# EAGLE board warp-revC (EAGLE 9.4.2)
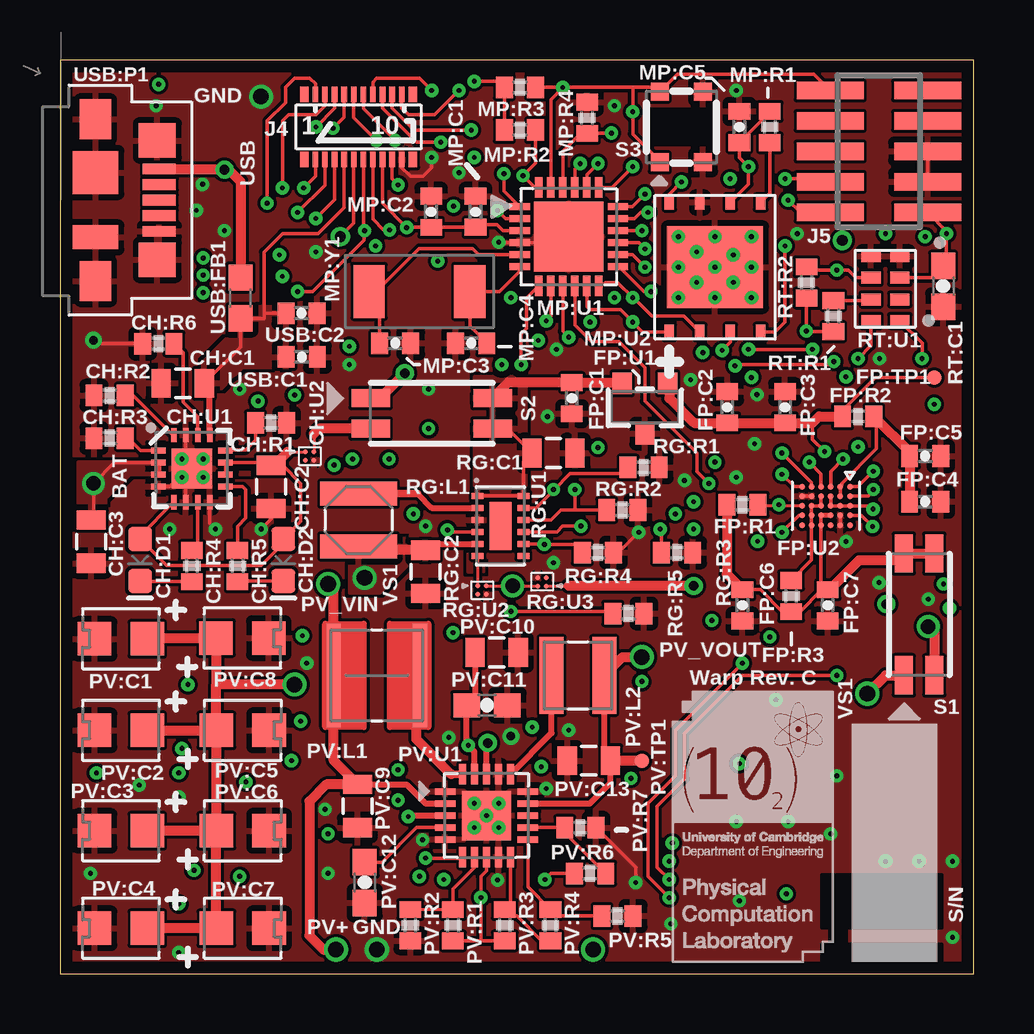
[diagram p0: board, top side]
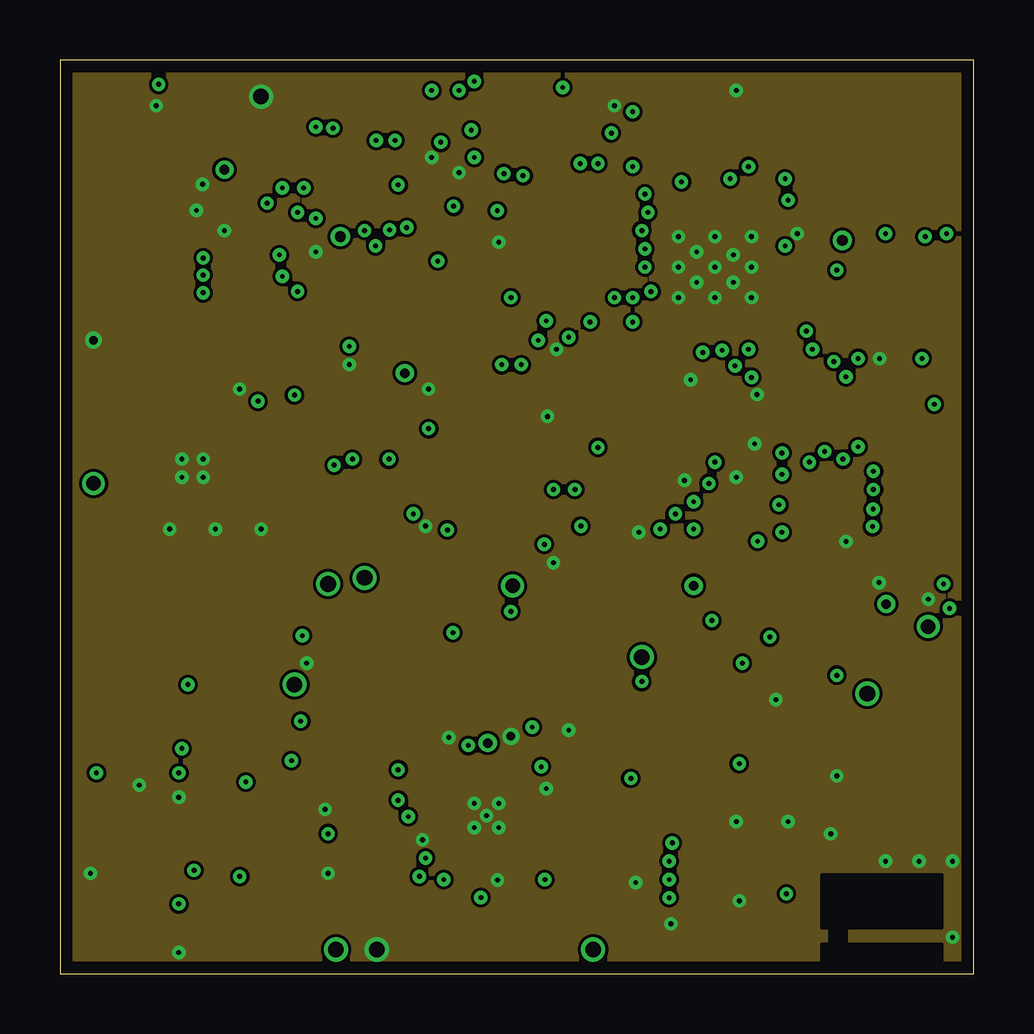
[diagram p1: board, inner layer Route2]
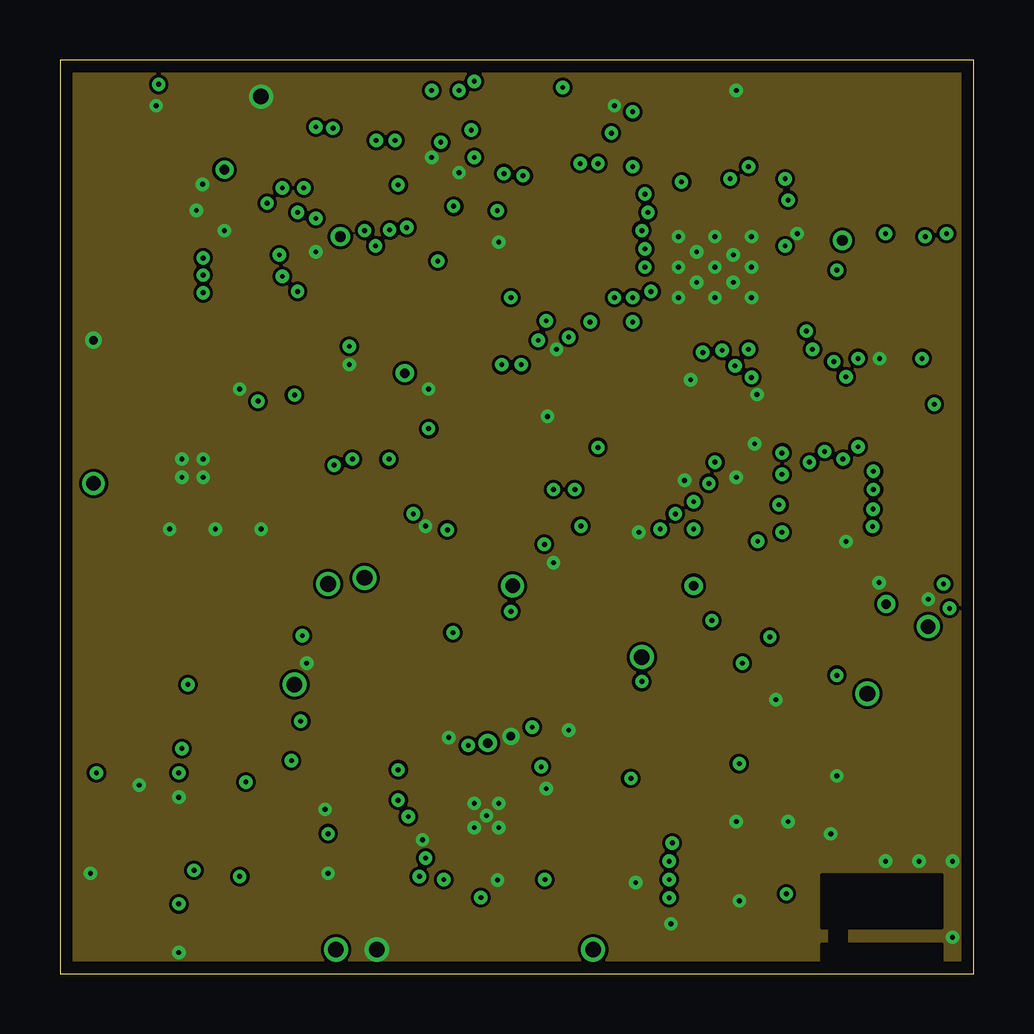
[diagram p2: board, inner layer Route3]
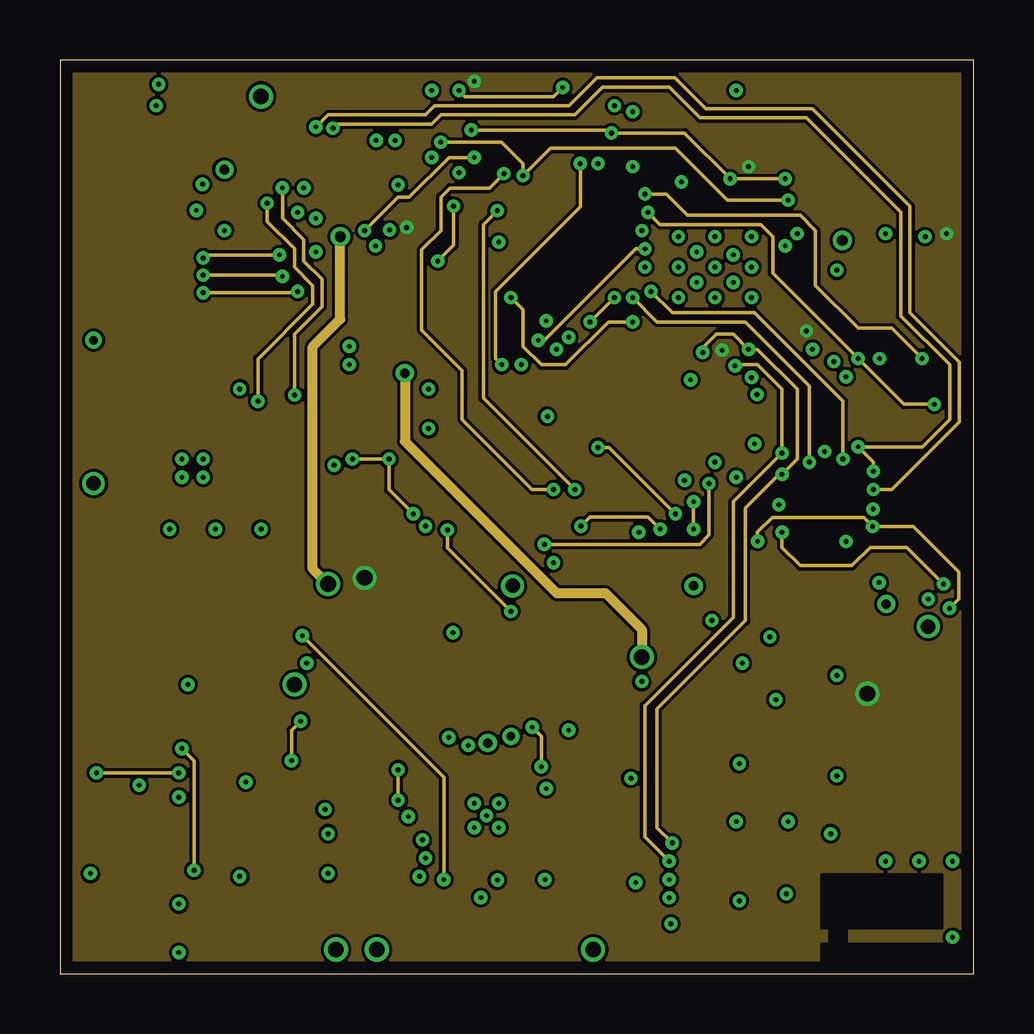
[diagram p3: board, inner layer Route4]
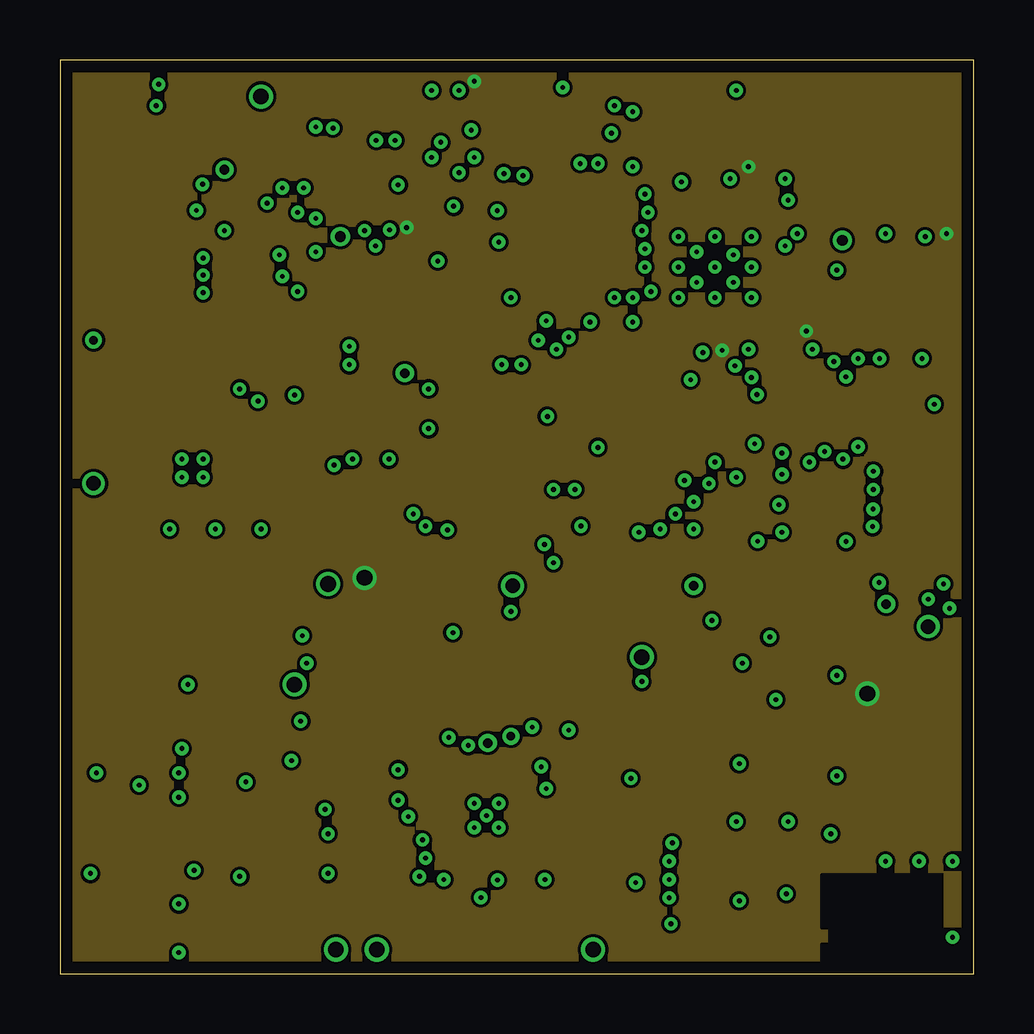
[diagram p4: board, inner layer Route5]
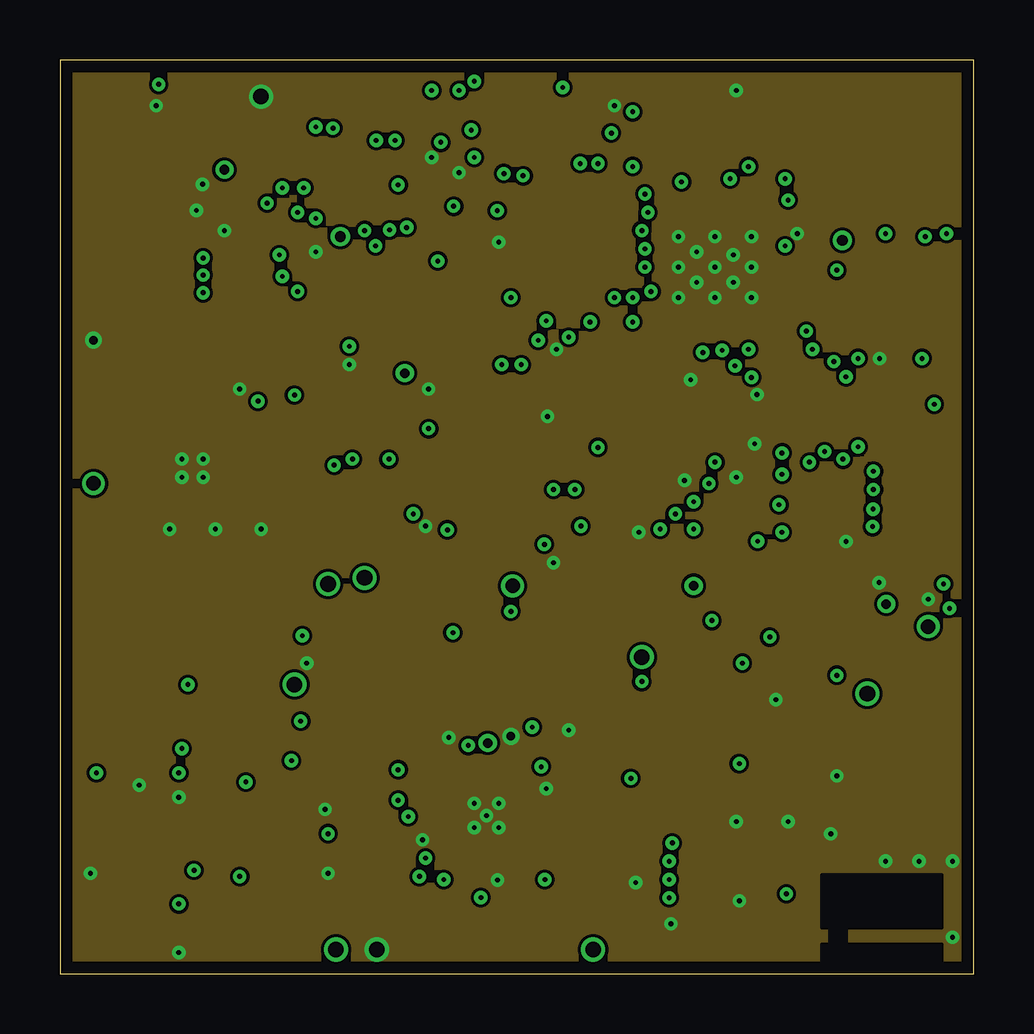
[diagram p5: board, inner layer Route6]
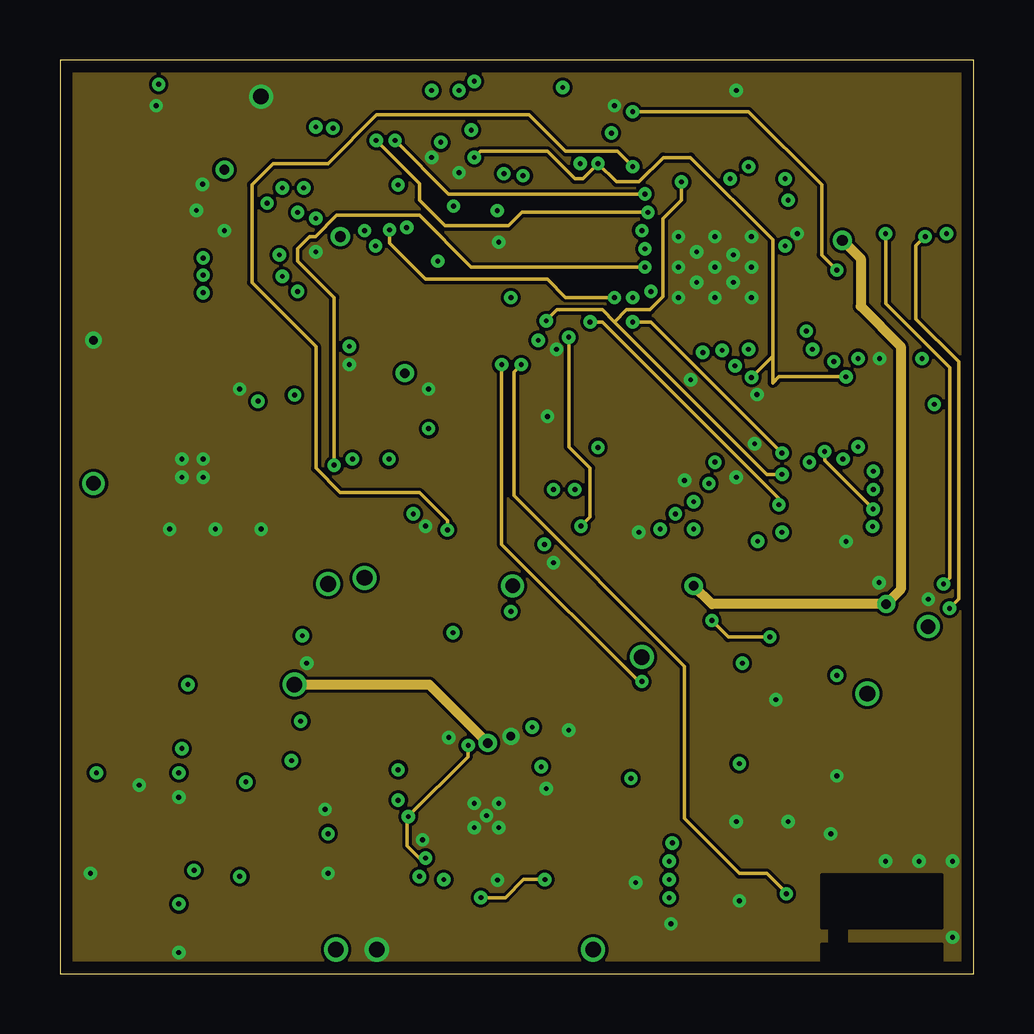
[diagram p6: board, inner layer Route7]
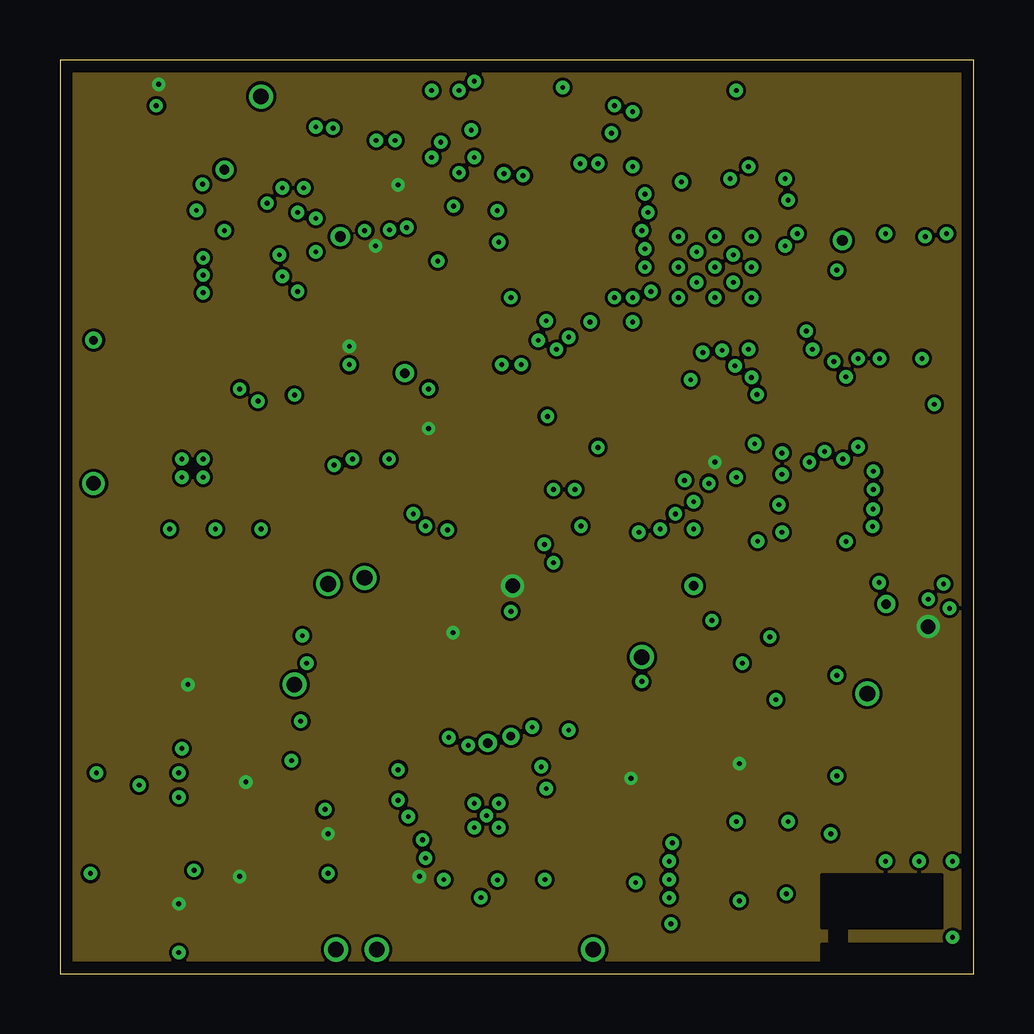
[diagram p7: board, inner layer Route14]
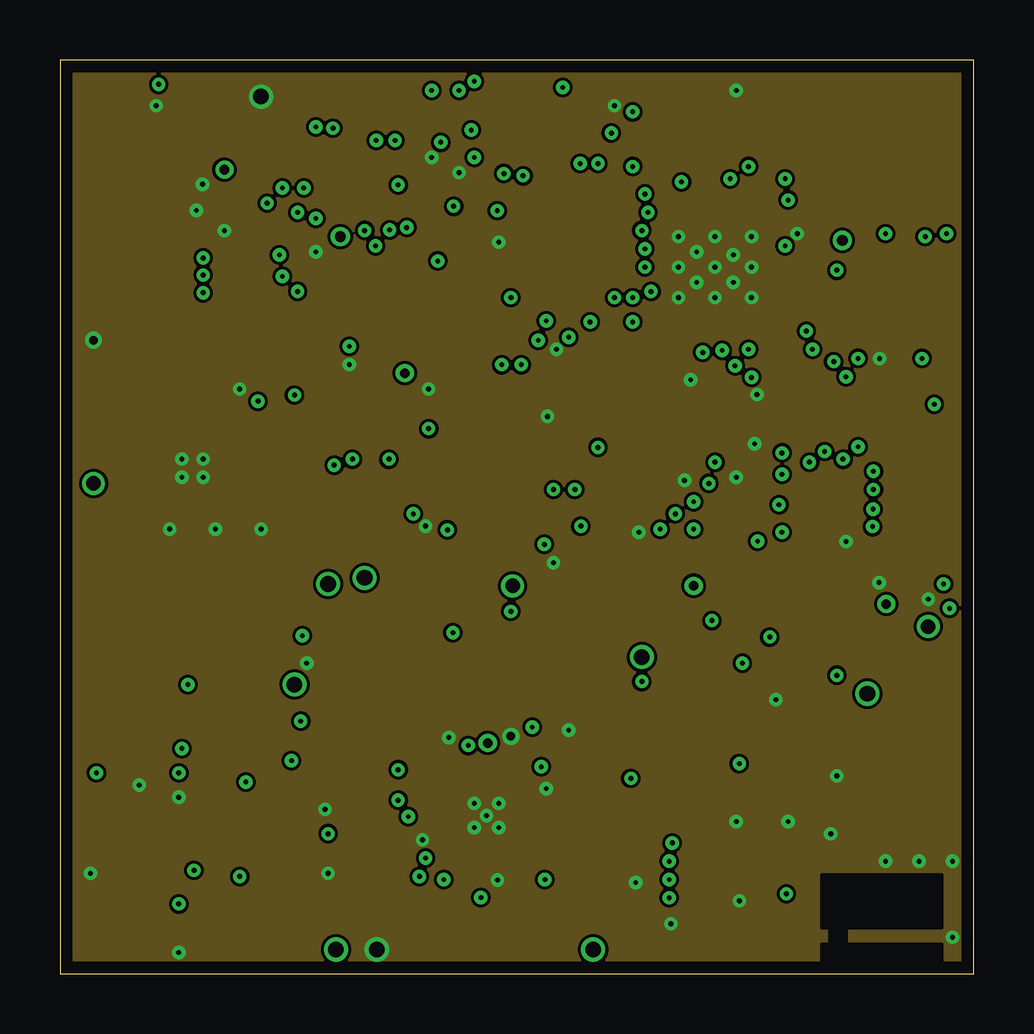
[diagram p8: board, inner layer Route15]
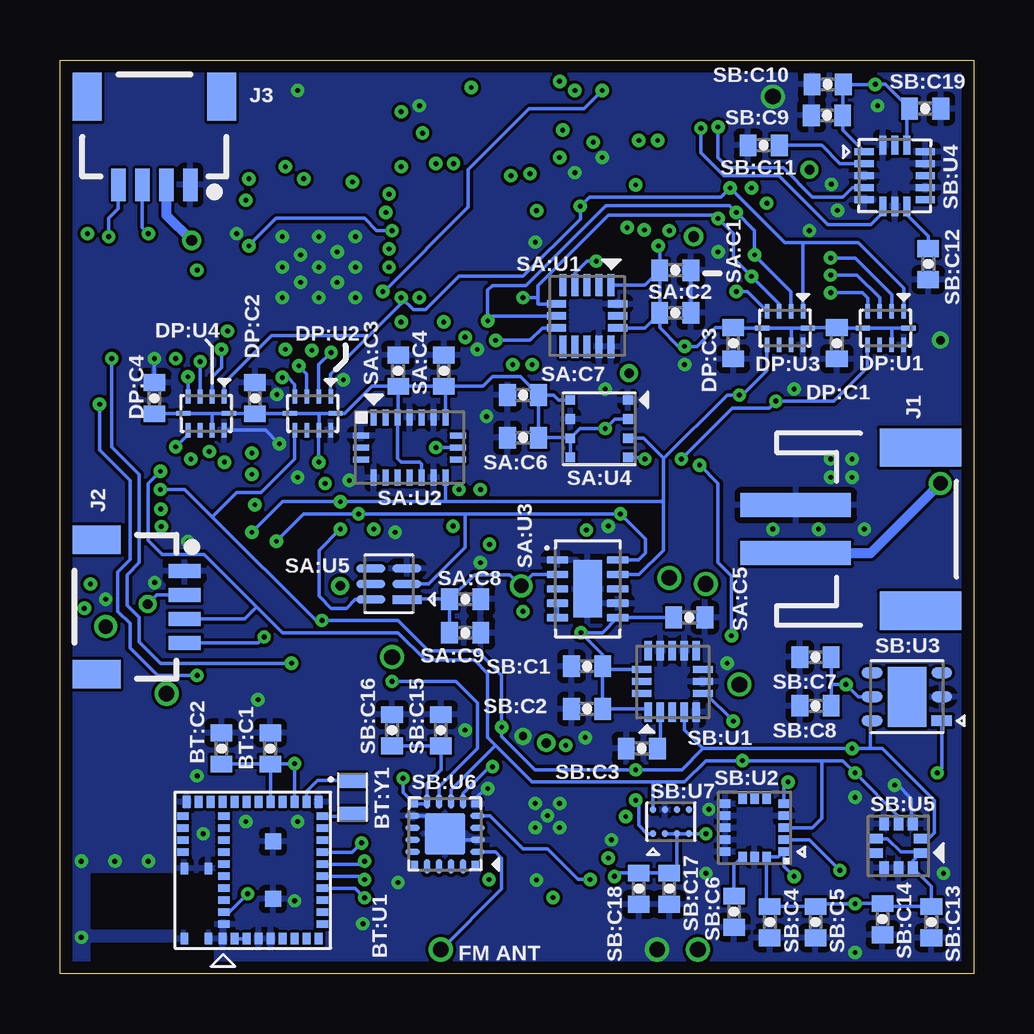
[diagram p9: board, bottom side, seen from below]

Size 38.1 x 38.1 mm. Coordinates in mm from the lower left corner, seen from the top.
Outline: 0,0 38.1,0 38.1,38.1 0,38.1 0,0
Copper layers [2:(1+(2*3)+4*5+6*7+14*15+16)]: Top 0.035mm / dielectric 0.1mm / Route2 0.035mm / dielectric 0.18mm / Route3 0.035mm / dielectric 0.1mm / Route4 0.035mm / dielectric 0.15mm / Route5 0.035mm / dielectric 0.2mm / Route6 0.035mm / dielectric 0.15mm / Route7 0.035mm / dielectric 0.2mm / Route14 0.035mm / dielectric 0.18mm / Route15 0.035mm / dielectric 0.1mm / Bottom 0.035mm
Design rules "default *": minimum track width 5mil, minimum drill 0.2mm, track to track 5mil, track to pad 5mil, pad to pad 5mil, via to via 6mil, smd to smd 5mil, copper to edge 20mil, drill to drill 10mil, minimum pad ring 7mil, minimum via ring 7mil, stop-mask expansion 4mil, vias tented up to drill 10mil, thermal gap 10mil

## Footprints (pad centres in the part's own frame; a part is rotated, then mirrored left to right if it is on the bottom)
0402-CAP = smd 0.7 x 0.9: 1 -0.65,0; 2 0.65,0
BGX13S = smd 0.48 x 0.32: 1 0,-1.6; 2 0,-2.1; 3 0,-2.6; 4 0,-3.1; 5 0,-3.6; 6 0,-4.1; 7 0,-4.6; 8 0,-5.1; 9 0,-5.6; 20 5.7,-5.6; 21 5.7,-5.1; 22 5.7,-4.6; 23 5.7,-4.1; 24 5.7,-3.6; 25 5.7,-3.1; 26 5.7,-2.6; 27 5.7,-2.1; 28 5.7,-1.6; 29 5.7,-1.1; 30 5.7,-0.6; 31 5.7,-0.1; 46 2.92,0; 47 0,0; 48 2.92,-1; 49 0,-1 | smd 0.32 x 0.48: 10 0.6,-5.75; 11 1.1,-5.75; 12 1.6,-5.75; 13 2.1,-5.75; 14 2.6,-5.75; 15 3.1,-5.75; 16 3.6,-5.75; 17 4.1,-5.75; 18 4.6,-5.75; 19 5.1,-5.75; 32 5.1,0.05; 33 4.6,0.05; 34 4.1,0.05; 35 3.6,0.05; 36 5.1,-1.65; 37 4.6,-1.65; 38 4.1,-1.65; 39 3.6,-1.65; 40 3.1,-1.65; 41 2.6,-1.65; 42 2.1,-1.65; 43 1.6,-1.65; 44 1.1,-1.65; 45 0.6,-1.65 | smd 0.67 x 0.67: 50 1.65,-3.7; 51 4.05,-3.7
IQXC-25 = smd 0.6 x 1.1: 1 -0.7,0; 2 0.7,0
0805 = smd 0.8 x 1.2: 1 -0.9,0; 2 0.9,0
LED-0603 = smd 1 x 1: A -0.877,0; C 0.877,0
0402-RES = smd 0.7 x 0.9: 1 -0.65,0; 2 0.65,0
PVQFN-N16 = smd 0.24 x 0.6: 1 -0.75,-1.4; 2 -0.25,-1.4; 3 0.25,-1.4; 4 0.75,-1.4; 9 0.75,1.4; 10 0.25,1.4; 11 -0.25,1.4; 12 -0.75,1.4 | smd 0.6 x 0.24: 5 1.4,-0.75; 6 1.4,-0.25; 7 1.4,0.25; 8 1.4,0.75; 13 -1.4,0.75; 14 -1.4,0.25; 15 -1.4,-0.25; 16 -1.4,-0.75 | smd 1.68 x 1.68: EP 0,0
DSBGA = smd 0.2 x 0.2: A1 -0.175,0.175; A2 0.175,0.175; B1 -0.175,-0.175; B2 0.175,-0.175
ISL23415 = smd 0.2 x 0.6: 1 0.75,0.7; 2 0.25,0.7; 3 -0.25,0.7; 4 -0.75,0.7; 6 -0.75,-0.7; 7 -0.25,-0.7; 8 0.25,-0.7; 9 0.75,-0.7 | smd 0.6 x 0.2: 5 -0.95,0; 10 0.95,0
TP06R = smd 0.6 x 0.6: TP 0,0
SOT23-3 = smd 0.8 x 0.9: 1 -0.95,-1; 2 0.95,-1; 3 0,1.1
LATTICE-WLCSP-30 = smd 0.26 x 0.26: A1 -0.8,1; A2 -0.4,1; A3 0,1; A4 0.4,1; A5 0.8,1; B1 -0.8,0.6; B2 -0.4,0.6; B3 0,0.6; B4 0.4,0.6; B5 0.8,0.6; C1 -0.8,0.2; C2 -0.4,0.2; C3 0,0.2; C4 0.4,0.2; C5 0.8,0.2; D1 -0.8,-0.2; D2 -0.4,-0.2; D3 0,-0.2; D4 0.4,-0.2; D5 0.8,-0.2; E1 -0.8,-0.6; E2 -0.4,-0.6; E3 0,-0.6; E4 0.4,-0.6; E5 0.8,-0.6; F1 -0.8,-1; F2 -0.4,-1; F3 0,-1; F4 0.4,-1; F5 0.8,-1
JST-2-SMD = smd 1 x 4.6: 1 -1,-2.3; 2 1,-2.3 | smd 1.6 x 3.4: NC1 -3.4,2.9; NC2 3.4,2.9
1X04_1MM_RA = smd 0.6 x 1.35: 1 -1.5,0; 2 -0.5,0; 3 0.5,0; 4 1.5,0 | smd 1.2 x 2: NC1 2.8,-3.675; NC2 -2.8,-3.675
DF40C-20DP-0.4V(51) = smd 0.24 x 0.66: P$1 -1.8,1.355; P$2 -1.4,1.355; P$3 -1,1.355; P$4 -0.6,1.355; P$5 -0.2,1.355; P$6 0.2,1.355; P$7 0.6,1.355; P$8 1,1.355; P$9 1.4,1.355; P$10 1.8,1.355; P$11 -1.8,-1.355; P$12 -1.4,-1.355; P$13 -1,-1.355; P$14 -0.6,-1.355; P$15 -0.2,-1.355; P$16 0.2,-1.355; P$17 0.6,-1.355; P$18 1,-1.355; P$19 1.4,-1.355; P$20 1.8,-1.355 | smd 0.36 x 0.66: P$21 -2.26,1.355; P$22 2.26,1.355; P$23 -2.26,-1.355; P$24 2.26,-1.355
FTSH-105-01-XXX-DV-K = smd 0.737 x 2.794: 1 -2.54,-2.032; 2 -2.54,2.032; 3 -1.27,-2.032; 4 -1.27,2.032; 5 0,-2.032; 6 0,2.032; 7 1.27,-2.032; 8 1.27,2.032; 9 2.54,-2.032; 10 2.54,2.032
MKL03Z32VFK4R = smd 0.85 x 0.3: P$1 -2.05,1.25; P$2 -2.05,0.75; P$3 -2.05,0.25; P$4 -2.05,-0.25; P$5 -2.05,-0.75; P$6 -2.05,-1.25; P$13 2.05,-1.25; P$14 2.05,-0.75; P$15 2.05,-0.25; P$16 2.05,0.25; P$17 2.05,0.75; P$18 2.05,1.25 | smd 0.3 x 0.85: P$7 -1.25,-2.05; P$8 -0.75,-2.05; P$9 -0.25,-2.05; P$10 0.25,-2.05; P$11 0.75,-2.05; P$12 1.25,-2.05; P$19 1.25,2.05; P$20 0.75,2.05; P$21 0.25,2.05; P$22 -0.25,2.05; P$23 -0.75,2.05; P$24 -1.25,2.05 | smd 2.9 x 2.9: P$PAD 0,0
UDFN = smd 0.6 x 0.4: 1 -2.7,1.905; 2 -2.7,0.635; 3 -2.7,-0.635; 4 -2.7,-1.905; 5 2.7,-1.905; 6 2.7,-0.635; 7 2.7,0.635; 8 2.7,1.905 | smd 3.4 x 4: 9 0,0
CM519 = smd 1.3 x 2.2: P$1 -2.1,0; P$2 2.1,0
CPX3225A752D = smd 1.4 x 1.4: + -1.1,0; - 1.1,0
0603-CAP = smd 1.1 x 1: 1 -0.85,0; 2 0.85,0
WE-TPC_3816 = smd 4.3 x 0.6: 1 0,-1.8; 2 0,1.8
WE-TPC_2811/2813_OLD = smd 3.2 x 1: 1 0,1.1; 2 0,-1.1
BQ25570 = smd 0.28 x 0.85: 1 -1,-1.725; 2 -0.5,-1.725; 3 0,-1.725; 4 0.5,-1.725; 5 1,-1.725; 11 1,1.725; 12 0.5,1.725; 13 0,1.725; 14 -0.5,1.725; 15 -1,1.725 | smd 0.85 x 0.28: 6 1.725,-1; 7 1.725,-0.5; 8 1.725,0; 9 1.725,0.5; 10 1.725,1; 16 -1.725,1; 17 -1.725,0.5; 18 -1.725,0; 19 -1.725,-0.5; 20 -1.725,-1 | smd 2.05 x 2.05: 21 0,0
WE-TPC_2828_OLD = smd 1 x 3.2: 1 -1.1,0; 2 1.1,0
WSON-12 = smd 0.25 x 0.5: 1 -1.25,-0.95; 2 -0.75,-0.95; 3 -0.25,-0.95; 4 0.25,-0.95; 5 0.75,-0.95; 6 1.25,-0.95; 7 1.25,0.95; 8 0.75,0.95; 9 0.25,0.95; 10 -0.25,0.95; 11 -0.75,0.95; 12 -1.25,0.95 | smd 2 x 0.9: PAD 0,0
RV-C7 = smd 0.5 x 0.8: 1 1.35,0.6; 2 0.45,0.6; 3 -0.45,0.6; 4 -1.35,0.6; 5 -1.35,-0.6; 6 -0.45,-0.6; 7 0.45,-0.6; 8 1.35,-0.6
CHS-02_SWITCH = smd 0.76 x 1.6: 1 -0.635,-2.54; 1' -0.635,2.54; 2 0.635,-2.54; 2' 0.635,2.54
EVPAYG0BA = smd 0.75 x 0.75: A -1.475,0.9; A' 1.475,0.9; B -1.475,-0.9; B' 1.475,-0.9
ADXL362 = smd 0.3 x 0.925: P$1 -1,-1.288; P$2 -0.5,-1.288; P$3 0,-1.288; P$4 0.5,-1.288; P$5 1,-1.288; P$9 1,1.288; P$10 0.5,1.288; P$11 0,1.288; P$12 -0.5,1.288; P$13 -1,1.288 | smd 0.8 x 0.3: P$6 1.275,-0.5; P$7 1.275,0; P$8 1.275,0.5; P$14 -1.275,0.5; P$15 -1.275,0; P$16 -1.275,-0.5
BMX055 = smd 0.25 x 0.675: P$1 -1.536,1.226; P$2 -1.036,1.226; P$3 -0.536,1.226; P$4 -0.036,1.226; P$5 0.464,1.226; P$6 0.964,1.226; P$7 1.464,1.226; P$11 1.464,-1.274; P$12 0.964,-1.274; P$13 0.464,-1.274; P$14 -0.036,-1.274; P$15 -0.536,-1.274; P$16 -1.036,-1.274; P$17 -1.536,-1.274 | smd 0.675 x 0.25: P$8 1.989,0.476; P$9 1.989,-0.024; P$10 1.989,-0.524; P$18 -2.051,-0.524; P$19 -2.051,-0.024; P$20 -2.051,0.476
SON60P270X400X110-11N = smd 0.32 x 0.91: 1 1.2,1.255; 2 0.6,1.255; 3 0,1.255; 4 -0.6,1.255; 5 -1.2,1.255; 6 -1.2,-1.255; 7 -0.6,-1.255; 8 0,-1.255; 9 0.6,-1.255; 10 1.2,-1.255 | smd 2.4 x 1.2: 11 0,0
BME680 = smd 0.4 x 0.4: 1 -1.2,1.2; 2 -0.4,1.2; 3 0.4,1.2; 4 1.2,1.2; 5 1.2,-1.2; 6 0.4,-1.2; 7 -0.4,-1.2; 8 -1.2,-1.2
TCS3772 = smd 0.35 x 1.2: 1 0.65,0.75; 2 0,0.75; 3 -0.65,0.75; 4 -0.65,-0.75; 5 0,-0.75; 6 0.65,-0.75
MMA8451Q = smd 0.305 x 0.813: 1 1,1.275; 2 0.5,1.275; 3 0,1.275; 4 -0.5,1.275; 5 -1,1.275; 9 -1,-1.275; 10 -0.5,-1.275; 11 0,-1.275; 12 0.5,-1.275 | smd 0.813 x 0.305: 6 -1.275,0.5; 7 -1.275,0; 8 -1.275,-0.5; 14 1.275,-0.5; 15 1.275,0; 16 1.275,0.5 | smd 0.305 x 0.81: 13 1,-1.275
L3GD20H = smd 0.35 x 0.45: 1 1,1.225; 2 0.5,1.225; 3 0,1.225; 4 -0.5,1.225; 5 -1,1.225; 9 -1,-1.225; 10 -0.5,-1.225; 11 0,-1.225; 12 0.5,-1.225; 13 1,-1.225 | smd 0.45 x 0.35: 6 -1.225,0.5; 7 -1.225,0; 8 -1.225,-0.5; 14 1.225,-0.5; 15 1.225,0; 16 1.225,0.5
SI7021 = smd 0.45 x 0.85: 1 1,1.45; 2 0,1.45; 3 -1,1.45; 4 -1,-1.45; 5 0,-1.45; 6 1,-1.45 | smd 2.5 x 1.6: 7 0,0
QFN16 = smd 0.3 x 0.8: P$1 1,1.275; P$2 0.5,1.275; P$3 0,1.275; P$4 -0.5,1.275; P$5 -1,1.275; P$9 -1,-1.275; P$10 -0.5,-1.275; P$11 0,-1.275; P$12 0.5,-1.275; P$13 1,-1.275 | smd 0.8 x 0.3: P$6 -1.275,0.5; P$7 -1.275,0; P$8 -1.275,-0.5; P$14 1.275,-0.5; P$15 1.275,0; P$16 1.275,0.5
LPS25H = smd 0.55 x 0.4: 1 -0.92,0.3; 2 -0.92,-0.3; 6 0.92,-0.3; 7 0.92,0.3 | smd 0.4 x 0.55: 3 -0.6,-0.92; 4 0,-0.92; 5 0.6,-0.92; 8 0.6,0.92; 9 0,0.92; 10 -0.6,0.92
SI4705 = smd 0.3 x 0.3: P$1 -1.31,1.28; P$6 -1.31,-1.25; P$11 1.22,-1.25; P$16 1.22,1.28 | smd 0.61 x 0.28: P$2 -1.4,0.75; P$3 -1.4,0.25; P$4 -1.4,-0.25; P$5 -1.4,-0.75; P$12 1.31,-0.75; P$13 1.31,-0.25; P$14 1.31,0.25; P$15 1.31,0.75 | smd 0.28 x 0.61: P$7 -0.8,-1.35; P$8 -0.3,-1.35; P$9 0.2,-1.35; P$10 0.7,-1.35; P$17 0.7,1.36; P$18 0.2,1.36; P$19 -0.3,1.36; P$20 -0.8,1.36 | smd 1.7 x 1.7: P$21 -0.05,0
HDC1000 = smd 0.275 x 0.275: A1 0.5,-0.75; A2 -0.5,-0.75; B1 0.5,-0.25; B2 -0.5,-0.25; C1 0.5,0.25; C2 -0.5,0.25; D1 0.5,0.75; D2 -0.5,0.75
0603 = smd 1.1 x 1: 1 -0.85,0; 2 0.85,0
USB-B-MICRO-SMD = smd 0.45 x 1.38: 1 -1.3,2.06; 2 -0.65,2.06; 3 0,2.06; 4 0.65,2.06; 5 1.3,2.06 | smd 1.65 x 1.3: S1 -3.375,-0.6; S4 3.375,-0.6 | smd 1.8 x 1.9: S2 -1.15,-0.6 | smd 1 x 1.9: S3 1.55,-0.6 | smd 1.425 x 1.55: S5 -2.487,1.975; S6 2.487,1.975

## Placement (x,y rotation side)
BT:C1  0.1uF  [0402-CAP]  29.34,9.4 90 bottom
BT:C2  1uF  [0402-CAP]  31.37,9.4 90 bottom
BT:U1  BGX13S22GA-V21R  [BGX13S]  32.92,1.47 90 bottom
BT:Y1  IQXC-25  [IQXC-25]  25.91,7.37 270 bottom
CH:C1  1uF  [0805]  5.12,24.62 180 top
CH:C2  4.7uF  [0805]  8.8,20.3 270 top
CH:C3  4.7uF  [0805]  1.31,18.02 270 top
CH:D1  Green  [LED-0603]  3.34,17.26 270 top
CH:D2  Red  [LED-0603]  9.31,17.26 270 top
CH:R1  2.94k  [0402-RES]  8.8,22.97 180 top
CH:R2  4.32k  [0402-RES]  2.07,24.11 0 top
CH:R3  10k  [0402-RES]  2.07,22.34 0 top
CH:R4  2k  [0402-RES]  5.5,17 270 top
CH:R5  2k  [0402-RES]  7.4,17 270 top
CH:R6  56.2k  [0402-RES]  4.1,26.27 0 top
CH:U1  BQ24230VQFN  [PVQFN-N16]  5.5,21.07 270 top
CH:U2  MAX40200  [DSBGA]  10.41,21.59 0 top
DP:C1  0.1uF  [0402-CAP]  5.71,26.29 270 bottom
DP:C2  0.1uF  [0402-CAP]  29.97,24 90 bottom
DP:C3  0.1uF  [0402-CAP]  10.03,26.29 270 bottom
DP:C4  0.1uF  [0402-CAP]  34.16,24 90 bottom
DP:U1  ISL23415UTQFN  [ISL23415]  3.68,26.92 0 bottom
DP:U2  ISL23415UTQFN  [ISL23415]  27.56,23.37 0 bottom
DP:U3  ISL23415UTQFN  [ISL23415]  7.87,26.92 0 bottom
DP:U4  ISL23415UTQFN  [ISL23415]  32,23.37 0 bottom
FP:C1  1uF  [0402-CAP]  21.34,24 270 top
FP:C2  1uF  [0402-CAP]  27.81,23.62 90 top
FP:C3  0.1uF  [0402-CAP]  30.23,23.62 90 top
FP:C4  0.1uF  [0402-CAP]  36.07,19.68 0 top
FP:C5  10uF  [0402-CAP]  36.07,21.59 0 top
FP:C6  10uF  [0402-CAP]  28.45,15.37 270 top
FP:C7  0.1uF  [0402-CAP]  32,15.37 270 top
FP:R1  10k  [0402-RES]  28.45,19.56 180 top
FP:R2  100  [0402-RES]  33.27,23.24 180 top
FP:R3  10k  [0402-RES]  30.48,15.75 270 top
FP:TP1  TPSTP06R  [TP06R]  36.44,24.86 270 top
FP:U1  MCP1811AT-012/TTSOT-23-3  [SOT23-3]  24.38,23.62 180 top
FP:U2  ICE40UP5K-UWG30  [LATTICE-WLCSP-30]  31.93,19.51 270 top
J1  [JST-2-SMD]  5.13,18.54 270 bottom
J2  QIIC connector  [1X04_1MM_RA]  32.9,15.3 270 bottom
J3  QIIC connector  [1X04_1MM_RA]  34.16,32.89 180 bottom
J4  DF40FC-20DP-0.4V(51)  [DF40C-20DP-0.4V(51)]  12.45,35.31 0 top
J5  FTSH-105-01-XXX-DV-K  [FTSH-105-01-XXX-DV-K]  34.14,34.29 90 top
MP:C1  0.1uF  [0402-CAP]  17.32,31.78 90 top
MP:C2  4.7uF  [0402-CAP]  15.47,31.77 90 top
MP:C3  33pF  [0402-CAP]  13.97,26.29 0 top
MP:C4  33pF  [0402-CAP]  17.14,26.29 180 top
MP:C5  0.1uF  [0402-CAP]  28.32,35.31 90 top
MP:R1  10k  [0402-RES]  29.59,35.31 90 top
MP:R2  10k  [0402-RES]  19.18,35.18 180 top
MP:R3  4.7k  [0402-RES]  19.18,36.96 180 top
MP:R4  10k  [0402-RES]  21.97,35.69 90 top
MP:U1  MKL03Z32VFK4RQFN24  [MKL03Z32VFK4R]  21.21,30.73 0 top
MP:U2  AT45DB641E-MHN-Y  [UDFN]  27.3,29.46 90 top
MP:Y1  CM519-SMD  [CM519]  14.99,28.45 0 top
PV:C1  CPX3225A7552D  [CPX3225A752D]  2.54,13.97 180 top
PV:C2  CPX3225A7552D  [CPX3225A752D]  2.54,10.16 180 top
PV:C3  CPX3225A7552D  [CPX3225A752D]  2.54,5.97 180 top
PV:C4  CPX3225A7552D  [CPX3225A752D]  2.54,1.91 180 top
PV:C5  CPX3225A7552D  [CPX3225A752D]  7.62,10.16 0 top
PV:C6  CPX3225A7552D  [CPX3225A752D]  7.62,5.97 0 top
PV:C7  CPX3225A7552D  [CPX3225A752D]  7.62,1.91 0 top
PV:C8  CPX3225A7552D  [CPX3225A752D]  7.6,14 0 top
PV:C9  4.7uF  [0805]  12.4,7 270 top
PV:C10  4.7uF  [0805]  18.2,13.4 0 top
PV:C11  0.1uF  [0603-CAP]  17.8,11.2 0 top
PV:C12  10nF  [0603-CAP]  12.7,3.81 270 top
PV:C13  22uF  [0805]  22.05,8.89 180 top
PV:L1  22uH  [WE-TPC_3816]  13.21,12.45 270 top
PV:L2  10uH  [WE-TPC_2811/2813_OLD]  21.59,12.45 270 top
PV:R1  4.02M  [0402-RES]  16.38,2.03 270 top
PV:R2  9.09M  [0402-RES]  14.61,2.03 90 top
PV:R3  1.3M  [0402-RES]  18.54,2.03 270 top
PV:R4  5.36M  [0402-RES]  20.45,2.03 270 top
PV:R5  6.49M  [0402-RES]  23.24,2.41 180 top
PV:R6  8.87M  [0402-RES]  22.1,4.19 180 top
PV:R7  4.22M  [0402-RES]  21.69,6.1 180 top
PV:TP1  TPSTP06R  [TP06R]  24.26,8.89 0 top
PV:U1  BQ25570PVQFN  [BQ25570]  17.78,6.6 270 top
RG:C1  10uF  [0805]  20.57,21.72 0 top
RG:C2  10uF  [0805]  15.24,16.76 270 top
RG:L1  2.2uH  [WE-TPC_2828_OLD]  12.45,18.92 270 top
RG:R1  2M  [0402-RES]  24.33,21.12 180 top
RG:R2  2M  [0402-RES]  23.44,19.34 180 top
RG:R3  2M  [0402-RES]  25.73,17.56 180 top
RG:R4  2M  [0402-RES]  22.43,17.56 180 top
RG:R5  2M  [0402-RES]  23.7,15.02 180 top
RG:U1  TPS6274XWSON  [WSON-12]  18.36,18.68 270 top
RG:U2  MAX40200  [DSBGA]  17.6,16 0 top
RG:U3  MAX40200  [DSBGA]  20.1,16.35 180 top
RT:C1  0.1uF  [0603-CAP]  36.82,28.66 270 top
RT:R1  10k  [0402-RES]  32.24,27.42 270 top
RT:R2  10k  [0402-RES]  31.12,28.82 270 top
RT:U1  RV-8803-C7_RTC  [RV-C7]  34.41,28.57 270 top
S1  CHS-02_SWITCH  [CHS-02_SWITCH]  35.81,14.99 0 top
S2  CHS-02_SWITCH  [CHS-02_SWITCH]  15.49,23.37 270 top
S3  EVPAYG0BAEVPAYG0BA  [EVPAYG0BA]  25.91,35.31 90 top
SA:C1  0.1uF  [0402-CAP]  12.45,29.34 0 bottom
SA:C2  1uF  [0402-CAP]  12.45,27.56 0 bottom
SA:C3  0.1uF  [0402-CAP]  24,25.15 90 bottom
SA:C4  1uF  [0402-CAP]  22.1,25.15 90 bottom
SA:C5  4.7uF  [0402-CAP]  11.87,14.86 0 bottom
SA:C6  0.1uF  [0402-CAP]  18.8,22.35 180 bottom
SA:C7  1uF  [0402-CAP]  18.8,24.13 180 bottom
SA:C8  0.1uF  [0402-CAP]  21.21,15.62 0 bottom
SA:C9  1uF  [0402-CAP]  21.21,14.22 0 bottom
SA:U1  ADXL362  [ADXL362]  16.13,27.43 180 bottom
SA:U2  BMX055  [BMX055]  23.5,21.97 0 bottom
SA:U3  CCS811  [SON60P270X400X110-11N]  16.1,16.05 90 bottom
SA:U4  BME680LGA  [BME680]  15.62,22.73 270 bottom
SA:U5  TCS34725FN  [TCS3772]  24.38,16.26 270 bottom
SB:C1  0.1uF  [0402-CAP]  16.13,12.83 180 bottom
SB:C2  1uF  [0402-CAP]  16.13,11.05 180 bottom
SB:C3  0.1uF  [0402-CAP]  13.84,9.4 180 bottom
SB:C4  0.1uF  [0402-CAP]  8.51,2.16 270 bottom
SB:C5  10uF  [0402-CAP]  6.6,2.16 270 bottom
SB:C6  10nF  [0402-CAP]  10,2.6 270 bottom
SB:C7  0.1uF  [0402-CAP]  6.6,13.21 180 bottom
SB:C8  1uF  [0402-CAP]  6.6,11.18 180 bottom
SB:C9  0.1uF  [0402-CAP]  6.12,35.79 180 bottom
SB:C10  4.7uF  [0402-CAP]  6.1,37.08 180 bottom
SB:C11  0.1uF  [0402-CAP]  8.76,34.54 180 bottom
SB:C12  0.1uF  [0402-CAP]  1.91,29.59 270 bottom
SB:C13  0.1uF  [0402-CAP]  1.78,2.16 270 bottom
SB:C14  4.7uF  [0402-CAP]  3.81,2.29 270 bottom
SB:C15  22nF  [0402-CAP]  22.23,10.16 90 bottom
SB:C16  0.1uF  [0402-CAP]  24.26,10.16 90 bottom
SB:C17  0.1uF  [0402-CAP]  12.7,3.56 270 bottom
SB:C18  1uF  [0402-CAP]  13.97,3.56 270 bottom
SB:C19  0.1uF  [0402-CAP]  2.03,36.07 0 bottom
SB:U1  MMA8451Q  [MMA8451Q]  12.57,12.19 180 bottom
SB:U2  L3GD20H  [L3GD20H]  9.14,6.1 270 bottom
SB:U3  SI7021  [SI7021]  2.79,11.56 270 bottom
SB:U4  FXOS8700CQ  [QFN16]  3.3,33.27 90 bottom
SB:U5  LPS25H  [LPS25H]  3.15,5.33 180 bottom
SB:U6  SI4705  [SI4705]  22.1,5.84 180 bottom
SB:U7  HDC1000  [HDC1000]  12.62,6.35 270 bottom
USB:C1  4.7uF  [0402-CAP]  10.08,25.72 0 top
USB:C2  0.1uF  [0402-CAP]  10.07,27.54 0 top
USB:FB1  600R/1A  [0603]  7.53,28.18 90 top
USB:P1  MOLEX_USB_47346-0001MICRO_USB_B  [USB-B-MICRO-SMD]  2.08,32.26 270 top

## Library data of the parts
BT:C1 BT:C2 CH:C1-CH:C3 CH:R1-CH:R6 DP:C1-DP:C4 FP:C1-FP:C7 FP:R1-FP:R3 MP:C1-MP:C5 MP:R1-MP:R4 PV:C9-PV:C11 PV:R1-PV:R7 RG:C1 RG:C2 RG:R1-RG:R5 RT:C1 RT:R1 RT:R2 SA:C1-SA:C9 SB:C1-SB:C19 USB:C1 USB:C2 USB:FB1 = SparkFun-Passives
BT:U1 = BGX13S
BT:Y1 = IQXC-25
CH:D1 CH:D2 = SparkFun-LED
CH:U1 = BQ24230
CH:U2 RG:U2 RG:U3 = MAX40200
DP:U1-DP:U4 = ISL23415
FP:TP1 PV:TP1 = testpad
FP:U1 = MCP1811AT-012:TT
FP:U2 = ICE40UP5K
J1 = SparkFun-Connectors; PROD_ID: CONN-11443; SF_ID: PRT-08612
J2 J3 = SparkX
J4 = DF40FC-20DP-0.4V(51)
J5 = FTSH-105-01-XXX-DV-K
MP:U1 = MKL03Z32VFK4R
MP:U2 = AT45D_Flash
MP:Y1 = CM519
PV:C1-PV:C8 = CPX3225A752D
PV:C12 = SparkFun-Passives; PN: GRM188R71H103KA01D
PV:C13 = SparkFun-Passives; PN: JMK212BJ226KG-T
PV:L1 = EMCComponents (rev19c); WE-NUMBER: 744031220/22uH
PV:L2 = EMCComponents (rev19c); WE-NUMBER: 744029100/10uH
PV:U1 = BQ25570
RG:L1 = EMCComponents (rev19c); WE-NUMBER: 744025002/2,2uH
RG:U1 = TPS6274x
RT:U1 = Micro Crystal RTC
S1 S2 = CHS_SWITCH
S3 = EVPAYG0BA
SA:U1 = ADXL362
SA:U2 = BMX055
SA:U3 = CCS811; AVAILABILITY: Unavailable; DESCRIPTION: CCS811B-JOPR5K LGA10 LF T&R; MF: ams; MP: CCS811; PACKAGE: LGA-11 ams; PRICE: None
SA:U4 = BME680
SA:U5 = TCS3772
SB:U1 = MMA8451Q
SB:U2 = L3GD20H
SB:U3 = SI7021
SB:U4 = FXOS8700CQ
SB:U5 = LPS25H
SB:U6 = SI4705
SB:U7 = HDC1000
USB:P1 = MOLEX MICRO USB

## Nets
ADXL362_SPI_CS: MP:U1.P$15 SA:U1.P$8
BAT: CH:C3.1 CH:U1.2 CH:U1.3 J1.2
BGX13S_!RST: BT:U1.44 MP:U1.P$7
BOOST_VBAT: PV:C1.+ PV:C2.+ PV:C3.+ PV:C4.+ PV:C5.+ PV:C6.+ PV:C7.+ PV:C8.+ PV:U1.18
BT:N$1: BT:U1.21 BT:Y1.1
BT:N$2: BT:U1.19 BT:Y1.2
BT:N$3: BT:U1.2 BT:U1.3
CH:BQ24230_OUT: CH:C2.1 CH:D1.A CH:D2.A CH:U1.5 CH:U1.10 CH:U1.11 CH:U2.A1
CH:N$1: CH:R2.2 CH:U1.16
CH:N$2: CH:R1.2 CH:U1.12
CH:N$3: CH:R4.1 CH:U1.7
CH:N$4: CH:R3.2 CH:U1.1
CH:N$5: CH:R5.1 CH:U1.9
CH:N$6: CH:D1.C CH:R4.2
CH:N$7: CH:D2.C CH:R5.2
CH:N$8: CH:R6.2 CH:U1.14
CHARGE_VOUT: CH:U2.A2 S2.2
CLK32K: MP:U1.P$21 SB:U6.P$9
CRESET_B: FP:R1.1 FP:U2.F3 J4.P$17
FP:ICE40_VCC_PLL: FP:C4.1 FP:C5.1 FP:R2.1 FP:U2.B1 FP:U2.B2
FP:VCC_1V2: FP:C2.1 FP:C3.1 FP:R2.2 FP:TP1.TP FP:U1.1 FP:U2.A3 FP:U2.B3 FP:U2.C2 FP:U2.C3
FP:VCC_SHUNT: FP:R3.1 FP:U2.D2 FP:U2.D3 FP:U2.E3 FP:U2.E4 FP:U2.E5
FPGA_CS: FP:U2.C1 J4.P$7 MP:U1.P$13
FPGA_VS: FP:C6.1 FP:C7.1 FP:R1.2 FP:R3.2 FP:U2.C4 FP:U2.D4 FP:U2.D5 S1.1' S1.2'
GND: BT:C1.2 BT:C2.2 BT:U1.1 BT:U1.4 BT:U1.5 BT:U1.20 BT:U1.31 BT:U1.45 BT:U1.46 BT:U1.47 BT:U1.48 BT:U1.49 BT:U1.50 BT:U1.51 CH:C1.2 CH:C2.2 CH:C3.2 CH:R1.1 CH:R2.1 CH:R3.1 CH:R6.1 CH:U1.4 CH:U1.6 CH:U1.8 CH:U1.15 CH:U1.EP CH:U2.B2 DP:C1.2 DP:C2.2 DP:C3.2 DP:C4.2 DP:U1.9 DP:U2.9 DP:U3.9 DP:U4.9 FP:C1.2 FP:C2.2 FP:C3.2 FP:C4.2 FP:C5.2 FP:C6.2 FP:C7.2 FP:U1.3 FP:U2.B4 FP:U2.B5 FP:U2.E2 FP:U2.F2 J1.1 J2.1 J3.1 J4.P$20 J5.3 J5.5 MP:C1.2 MP:C2.2 MP:C3.2 MP:C4.2 MP:C5.2 MP:R4.2 MP:U1.P$4 MP:U1.P$PAD MP:U2.7 MP:U2.9 PV:C1.- PV:C2.- PV:C3.- PV:C4.- PV:C5.- PV:C6.- PV:C7.- PV:C8.- PV:C9.2 PV:C10.2 PV:C11.2 PV:C12.2 PV:C13.2 PV:R2.1 PV:R5.1 PV:R7.1 PV:U1.1 PV:U1.5 PV:U1.9 PV:U1.15 PV:U1.17 PV:U1.21 RG:C1.2 RG:C2.2 RG:R1.1 RG:R2.1 RG:R3.1 RG:R4.1 RG:R5.1 RG:U1.3 RG:U2.B2 RG:U3.B2 RT:C1.2 RT:U1.4 RT:U1.5 S3.B S3.B' SA:C1.2 SA:C2.2 SA:C3.2 SA:C4.2 SA:C5.2 SA:C6.2 SA:C7.2 SA:C8.2 SA:C9.2 SA:U1.P$12 SA:U1.P$13 SA:U1.P$16 SA:U2.P$4 SA:U2.P$6 SA:U2.P$12 SA:U2.P$17 SA:U2.P$20 SA:U3.1 SA:U3.7 SA:U3.11 SA:U4.1 SA:U4.7 SA:U5.3 SB:C1.2 SB:C2.2 SB:C3.2 SB:C4.2 SB:C5.2 SB:C6.2 SB:C7.2 SB:C8.2 SB:C9.2 SB:C10.2 SB:C11.2 SB:C12.2 SB:C13.2 SB:C14.2 SB:C15.2 SB:C16.2 SB:C17.2 SB:C18.2 SB:C19.2 SB:U1.5 SB:U1.7 SB:U1.10 SB:U1.12 SB:U2.4 SB:U2.9 SB:U2.10 SB:U2.11 SB:U2.12 SB:U2.13 SB:U2.15 SB:U3.2 SB:U4.P$3 SB:U4.P$5 SB:U4.P$7 SB:U4.P$10 SB:U4.P$12 SB:U4.P$13 SB:U4.P$16 SB:U5.3 SB:U5.5 SB:U5.8 SB:U5.9 SB:U6.P$3 SB:U6.P$6 SB:U6.P$12 SB:U6.P$21 SB:U7.B2 USB:C1.2 USB:C2.2 USB:P1.5 USB:P1.S1 USB:P1.S2 USB:P1.S3 USB:P1.S4 USB:P1.S5 USB:P1.S6
I2C0_SCL/UART_TX: BT:U1.14 J4.P$5 MP:U1.P$17 RT:U1.8
I2C0_SDA/UART_RX: BT:U1.13 J4.P$6 MP:U1.P$18 RT:U1.1
I2C1_SCL: DP:U1.6 FP:U2.A4 J3.4 J4.P$1 SA:U2.P$9 SA:U3.10 SA:U4.4 SA:U5.2
I2C1_SDA: DP:U3.6 FP:U2.F4 J3.3 J4.P$2 SA:U2.P$11 SA:U3.9 SA:U4.3 SA:U5.6
I2C2_SCL: DP:U2.6 FP:U2.A2 J2.4 J4.P$3 SB:U1.4 SB:U2.2 SB:U3.6 SB:U4.P$4 SB:U5.2 SB:U6.P$7 SB:U7.A1
I2C2_SDA: DP:U4.6 FP:U2.A1 J2.3 J4.P$4 SB:U1.6 SB:U2.3 SB:U3.1 SB:U4.P$6 SB:U5.4 SB:U6.P$8 SB:U7.A2
ISL23415_SPI_CS: DP:U1.4 DP:U2.4 DP:U3.4 DP:U4.4 J4.P$16 MP:U1.P$20
MP:AT45DB321F_SPI_CS: MP:U1.P$16 MP:U2.4
MP:EXTAL0: MP:C3.1 MP:U1.P$5 MP:Y1.P$1
MP:N$4: MP:R1.1 MP:U2.5
MP:XTAL0: MP:C4.1 MP:U1.P$6 MP:Y1.P$2
PV:LBOOST: PV:L1.2 PV:U1.20
PV:LBUCK: PV:L2.2 PV:U1.16
PV:OK_HYST: PV:R3.1 PV:R4.2 PV:U1.10
PV:OK_PROG: PV:R4.1 PV:R5.2 PV:U1.11
PV:VBAT_OV: PV:R1.1 PV:R2.2 PV:U1.7
PV:VOUT_SET: PV:R6.1 PV:R7.2 PV:U1.12
PV:VRDIV: PV:R1.2 PV:R3.2 PV:R6.2 PV:U1.8
PV:VREF_SAMP: PV:C12.1 PV:U1.4
PV:VSTOR: PV:C10.1 PV:C11.1 PV:U1.3 PV:U1.6 PV:U1.19
PV_VIN: J4.P$15 PV:C9.1 PV:L1.1 PV:U1.2
PV_VOUT: PV:C13.1 PV:L2.1 PV:TP1.TP PV:U1.14 S2.1
REG_CTRL: MP:U1.P$19 RG:R5.2 RG:U1.4
REG_VIN: FP:C1.1 FP:U1.2 RG:C1.1 RG:U1.1 RG:U1.12 S2.1' S2.2'
REG_VSEL1: MP:U1.P$1 RG:R1.2 RG:U1.11
REG_VSEL2: MP:U1.P$2 RG:R2.2 RG:U1.10
REG_VSEL3: MP:U1.P$9 RG:R3.2 RG:U1.9
REG_VSEL4: MP:U1.P$10 RG:R4.2 RG:U1.8
RG:LOAD: RG:U1.6 RG:U2.A1
RG:SW: RG:L1.1 RG:U1.2
RT:N$3: RT:R1.1 RT:U1.7
RTC_!INT!/RESET_B: J4.P$10 J5.10 MP:R3.1 MP:U1.P$23 RT:R2.1 RT:U1.6 S3.A S3.A'
SA:N$2: SA:U3.4 SA:U3.5
SB:CAP: SB:C6.1 SB:U2.14
SB:N$1: SB:C3.1 SB:U1.2
SB:N$2: SB:C11.1 SB:U4.P$2
SB:N$3: SB:C12.1 SB:U4.P$8
SB:SI4705_FMI: SB:U6.P$2
SI4705_!RST: MP:U1.P$14 SB:U6.P$5
SPI_MISO/UART_RTS: BT:U1.16 DP:U1.2 DP:U2.2 DP:U3.2 DP:U4.2 FP:U2.F1 J4.P$12 MP:U1.P$8 MP:U2.8 SA:U1.P$7
SPI_MOSI/UART_CTS: BT:U1.15 DP:U1.3 DP:U2.3 DP:U3.3 DP:U4.3 FP:U2.E1 J4.P$13 MP:U1.P$11 MP:U2.1 SA:U1.P$6
SPI_SCK: DP:U1.1 DP:U2.1 DP:U3.1 DP:U4.1 FP:U2.D1 J4.P$11 MP:U1.P$12 MP:U2.2 SA:U1.P$4
SWD_CLK: J4.P$9 J5.4 MP:R4.1 MP:U1.P$22
SWD_DIO: J4.P$8 J5.2 MP:R2.1 MP:U1.P$24
USB:VBUS: USB:FB1.2 USB:P1.1
USB_5V: CH:C1.1 CH:U1.13 J4.P$14 USB:C1.1 USB:C2.1 USB:FB1.1
VCC_QIIC: J2.2 J3.2 RG:U3.A1
VS1: J4.P$18 J5.1 MP:C1.1 MP:C2.1 MP:C5.1 MP:R1.2 MP:R2.2 MP:R3.2 MP:U1.P$3 MP:U2.3 MP:U2.6 RG:C2.1 RG:L1.2 RG:U1.5 RT:C1.1 RT:R1.2 RT:R2.2 RT:U1.3 S1.1
VS2: BT:C1.1 BT:C2.1 BT:U1.22 BT:U1.24 DP:C1.1 DP:C2.1 DP:C3.1 DP:C4.1 DP:U1.5 DP:U1.8 DP:U1.10 DP:U2.5 DP:U2.8 DP:U2.10 DP:U3.5 DP:U3.8 DP:U3.10 DP:U4.5 DP:U4.8 DP:U4.10 J4.P$19 RG:U2.A2 RG:U3.A2 S1.2 SA:C1.1 SA:C2.1 SA:C3.1 SA:C4.1 SA:C5.1 SA:C6.1 SA:C7.1 SA:C8.1 SA:C9.1 SA:U1.P$1 SA:U1.P$14 SA:U2.P$3 SA:U2.P$7 SA:U2.P$13 SA:U3.2 SA:U3.6 SA:U4.2 SA:U4.5 SA:U4.6 SA:U4.8 SA:U5.1 SB:C1.1 SB:C2.1 SB:C4.1 SB:C5.1 SB:C7.1 SB:C8.1 SB:C9.1 SB:C10.1 SB:C13.1 SB:C14.1 SB:C15.1 SB:C16.1 SB:C17.1 SB:C18.1 SB:C19.1 SB:U1.1 SB:U1.14 SB:U2.1 SB:U2.5 SB:U2.16 SB:U3.5 SB:U4.P$1 SB:U4.P$14 SB:U5.1 SB:U5.6 SB:U5.10 SB:U6.P$10 SB:U6.P$11 SB:U7.B1 SB:U7.C1 SB:U7.D1

## Tracks (layer width: path | path; a pad name or v marks a point on that pad's centre or on a via)
ADXL362_SPI_CS  (via drill 0.2)
  Top 0.152: MP:U1.P$15 24.13,30.48 v24.38,30.23
  Route4 0.152: v24.38,30.23 24,30.23 20.19,26.42 v19.94,26.42
  Bottom 0.152: v19.94,26.42 18.5,26.42 17.99,26.93 SA:U1.P$8
ANT_CLEAR
  cutout Bottom: 31.76,0.23 36.76,0.23 36.76,1.23 32.77,1.23 32.77,1.93 36.76,1.93 36.76,4.13 31.76,4.13 31.76,1.93 32.09,1.93 32.09,1.23 31.76,1.23
  cutout Top: 31.76,0.23 36.76,0.23 36.76,1.23 32.77,1.23 32.77,1.93 36.76,1.93 36.76,4.13 31.76,4.13 31.76,1.93 32.09,1.93 32.09,1.23 31.76,1.23
  cutout Route3: 31.76,0.23 36.76,0.23 36.76,1.23 32.77,1.23 32.77,1.93 36.76,1.93 36.76,4.13 31.76,4.13 31.76,1.93 32.09,1.93 32.09,1.23 31.76,1.23
  cutout Route4: 31.76,0.23 36.76,0.23 36.76,1.23 32.77,1.23 32.77,1.93 36.76,1.93 36.76,4.13 31.76,4.13 31.76,1.93 32.09,1.93 32.09,1.23 31.76,1.23
  cutout Route2: 31.76,0.23 36.76,0.23 36.76,1.23 32.77,1.23 32.77,1.93 36.76,1.93 36.76,4.13 31.76,4.13 31.76,1.93 32.09,1.93 32.09,1.23 31.76,1.23
  cutout Route5: 31.76,0.23 36.76,0.23 36.76,1.23 32.77,1.23 32.77,1.93 36.76,1.93 36.76,4.13 31.76,4.13 31.76,1.93 32.09,1.93 32.09,1.23 31.76,1.23
  cutout Route15: 31.76,0.23 36.76,0.23 36.76,1.23 32.77,1.23 32.77,1.93 36.76,1.93 36.76,4.13 31.76,4.13 31.76,1.93 32.09,1.93 32.09,1.23 31.76,1.23
  cutout Route14: 31.76,0.23 36.76,0.23 36.76,1.23 32.77,1.23 32.77,1.93 36.76,1.93 36.76,4.13 31.76,4.13 31.76,1.93 32.09,1.93 32.09,1.23 31.76,1.23
  cutout Route7: 31.76,0.23 36.76,0.23 36.76,1.23 32.77,1.23 32.77,1.93 36.76,1.93 36.76,4.13 31.76,4.13 31.76,1.93 32.09,1.93 32.09,1.23 31.76,1.23
  cutout Route6: 31.76,0.23 36.76,0.23 36.76,1.23 32.77,1.23 32.77,1.93 36.76,1.93 36.76,4.13 31.76,4.13 31.76,1.93 32.09,1.93 32.09,1.23 31.76,1.23
BAT  (via drill 0.6)
  Top 0.152: CH:U1.2 2.27,21.32 v1.4,20.45 1.4,19.01 CH:C3.1
  Top 0.254: CH:U1.2 CH:U1.3
  Bottom 0.406: J1.2 4.3,17.54 v1.4,20.45
  pour Top (isolate 0.254): 4.32,21.34 0.76,21.34 0.76,19.18 1.91,19.18 1.91,19.81 2.92,20.83 4.32,20.83
BGX13S_!RST  (via drill 0.2)
  Top 0.152: v19.23,25.4 19.23,26.67 19.45,26.89 19.45,28.18 MP:U1.P$7
  Route7 0.152: v19.23,25.4 18.92,25.09 18.92,19.94 26.04,12.83 26.04,6.48 28.32,4.19 29.46,4.19 30.28,3.38 v30.28,3.34
  Bottom 0.152: BT:U1.44 31.05,2.57 v30.28,3.34
BOOST_VBAT  (via drill 0.4, 0.65)
  Top 0.254: v17.83,9.63 17.78,9.58 PV:U1.18 | PV:C1.+ 3.67,14 | PV:C8.+ 6.52,13.98
  Top 0.406: PV:C2.+ PV:C5.+ | PV:C6.+ PV:C3.+ | PV:C4.+ PV:C7.+ PV:C6.+ | PV:C5.+ PV:C6.+ | v9.78,12.06 6.52,12.06 | PV:C5.+ 6.52,12.06 | 3.67,14 PV:C8.+ | 6.52,13.98 6.52,12.06
  Route7 0.406: v9.78,12.06 15.39,12.06 v17.83,9.63
BT:N$1
  Bottom 0.152: BT:Y1.1 27.37,8.07 27.82,7.61 BT:U1.21
BT:N$2
  Bottom 0.152: BT:U1.19 26,6.57 BT:Y1.2
BT:N$3
  Bottom 0.152: BT:U1.2 BT:U1.3
CH:BQ24230_OUT
  Top 0.127: 9.49,21.77 CH:U2.A1
  Top 0.152: CH:C2.1 8.93,21.2 | CH:C2.1 9.28,21.2 10.03,20.45 10.03,18.86 CH:D2.A 9.31,17.95 8.38,17.02 4.46,17.02 CH:D1.A 3.34,18.26 CH:U1.5 | CH:C2.1 8.69,21.32 CH:U1.11 CH:U1.10
  Top 0.406: 9.49,21.77 8.93,21.2
CH:N$1
  Top 0.152: CH:R2.2 3.05,24.11 4.7,22.47 CH:U1.16
CH:N$2
  Top 0.152: CH:R1.2 8.15,22.25 7.75,21.84 6.93,21.84 CH:U1.12
CH:N$3
  Top 0.152: CH:U1.7 5.75,17.9 CH:R4.1
CH:N$4
  Top 0.152: CH:U1.1 3.37,21.82 2.85,22.34 CH:R3.2
CH:N$5
  Top 0.152: CH:R5.1 7.4,18.65 7.75,19 7.75,20.19 7.62,20.32 CH:U1.9
CH:N$6
  Top 0.152: CH:R4.2 3.37,16.35 CH:D1.C
CH:N$7
  Top 0.152: CH:R5.2 7.43,16.38 CH:D2.C
CH:N$8
  Top 0.152: CH:U1.14 5.75,23.23 5.13,23.84 5.13,25.89 CH:R6.2
CHARGE_VOUT
  Top 0.127: 10.59,22.53 CH:U2.A2
  Top 0.406: S2.2 10.79,22.73 10.59,22.53
  pour Top (isolate 0.254): 6.6,20.83 9.44,20.83 9.44,21.59 8.13,21.59 7.87,21.34 6.6,21.34
CLK32K  (via drill 0.2)
  Top 0.152: MP:U1.P$21 21.46,33.55 v21.69,33.78
  Route4 0.152: v21.69,33.78 21.69,31.98 18.16,28.45 18.16,25.65 v18.41,25.4
  Route7 0.152: v24.26,12.19 24.13,12.19 18.41,17.91 v18.41,25.4
  Bottom 0.152: SB:U6.P$9 22.3,7.8 20.7,9.4 20.7,11.3 21.59,12.19 v24.26,12.19
CRESET_B  (via drill 0.2)
  Top 0.127: FP:U2.F3 29.97,19.51 | 29.97,19.51 29.14,19.51 FP:R1.1 | v29.97,19.56 29.97,19.51
  Top 0.152: v13.74,31.01 13.49,31.01 13.05,31.45 J4.P$17
  Route4 0.152: v23.11,28.19 v22.1,27.18
  Route7 0.152: v23.11,28.19 21.08,28.19 20.32,28.96 15.24,28.96 13.74,30.45 v13.74,31.01 | v22.1,27.18 22.61,27.18 29.97,19.81 v29.97,19.56
FP:ICE40_VCC_PLL
  Top 0.152: FP:U2.B2 FP:U2.B1 32.6,20.38 32.6,20.45 34.04,21.89 34.04,23.13 FP:R2.1
  Top 0.406: FP:R2.1 35.42,21.75 FP:C5.1 FP:C4.1
FP:VCC_1V2  (via drill 0.2)
  Top 0.127: 26.42,22.99 26.43,22.97
  Top 0.152: FP:TP1.TP 33.99,24.86 32.62,23.5 FP:R2.2 | v31.88,21.78 31.37,22.29 31.37,22.97 | FP:U2.C2 FP:U2.C3 FP:U2.B3 FP:U2.A3 33.76,19.51 v33.9,19.38
  Top 0.406: 25.4,24.62 25.4,24 26.42,22.99 | 26.43,22.97 FP:C2.1 FP:C3.1 31.37,22.97 31.64,23.24 FP:R2.2
  Top 0.61: FP:U1.1 25.4,24.62
  Route7 0.152: v31.88,21.78 31.88,21.4 v33.9,19.38
FP:VCC_SHUNT
  Top 0.152: FP:U2.D2 FP:U2.D3 FP:U2.E3 FP:U2.E4 FP:U2.E5 31.33,17.25 FP:R3.1
FPGA_CS  (via drill 0.2)
  Top 0.152: FP:U2.C1 32.13,20.95 v32.64,21.46 | v15.49,36.83 14.99,37.34 13.21,37.34 13.05,37.18 J4.P$7 | v24.64,28.45 24.34,28.45 23.3,29.48 MP:U1.P$13
  Route4 0.152: v24.64,28.45 25.53,27.56 28.96,27.56 32.64,23.88 v32.64,21.46
  Bottom 0.152: v15.49,36.83 16.26,36.07 18.54,36.07 21.08,33.53 21.08,31.96 24.59,28.45 v24.64,28.45
FPGA_VS
  Top 0.152: FP:U2.D4 FP:U2.D5 31.73,16.29 FP:C7.1 31.77,16.02 30.85,15.1 FP:R3.2 30.11,15.1 29.2,16.02 FP:C6.1
  Top 0.2: FP:U2.C4 FP:U2.D4
  Top 0.406: FP:R1.2 27.8,16.67 FP:C6.1 | FP:C7.1 32.09,16.02 33.31,17.24 34.89,17.24 S1.1' S1.2'
GND  (via drill 0.2, 0.35, 0.65)
  Top 0.15: MP:U1.P$PAD 20.96,30.48 MP:U1.P$4 18.31,30.48 v18.29,30.5
  Top 0.152: CH:R6.1 1.54,26.27 v1.4,26.42 | RG:R4.1 23.28,17.56 v24.13,18.41 | CH:U1.4 4.57,20.32 4.89,20.64 4.95,20.57 | 4.95,20.57 v5.08,20.7 5.45,21.07 CH:U1.EP | CH:U1.15 5.25,21.63 v5.08,21.46 | v6.48,18.54 6.25,18.77 CH:U1.8 | CH:U1.6 5.25,20.28 4.95,20.57 | v24,3.81 24,4.45 PV:R7.1 | v15.49,34.04 15.49,33.62 15.12,33.25 14.61,33.25 14.25,33.61 J4.P$20 | CH:C2.2 8.8,18.96 v8.38,18.54 | FP:U2.B4 FP:U2.B5 | FP:U2.E2 FP:U2.F2 | J5.5 J5.3
  Bottom 0.152: DP:U4.9 29.53,22.67 v28.96,22.1 | SB:U6.P$3 21.8,5.59 SB:U6.P$21 22.8,6.59 SB:U6.P$12 | SB:U6.P$6 20.79,7.29 20.36,7.72 v20.27,7.72 | SA:C2.2 SA:C1.2 | v3.3,7.87 3.17,7.87 2.6,7.3 2.6,6.31 SB:U5.3 | v34.16,25.65 DP:C4.2
  other vias: 13.21,1.02 16.21,9.86 25.47,2.09 37.21,4.7 37.21,1.52 34.42,4.7 28.32,3.05 32.38,8.26 28.19,6.35 35.81,4.7 23.11,36.2 4.57,18.54 11.18,4.19 1.27,4.19 4.95,0.89 4.95,7.37 25.78,30.73 27.3,30.73 28.83,30.73 25.78,29.46 28.83,29.46 25.78,28.19 27.3,28.19 28.83,28.19 32.77,18.03 30.73,30.86 28.19,36.83 15.24,18.67 17.27,7.11 28.19,20.7 12.06,25.4 10.29,12.95 26.04,20.57 20.57,17.14 7.49,24.38 20.32,23.24 26.29,24.77 16.64,33.4 15.11,5.59 18.24,3.91 18.29,6.1 18.29,7.11 17.27,6.1 15.37,24.38 5.97,21.46 5.97,20.7 21.21,10.16 20.7,26.04 36.2,15.62 29.84,11.43 17.78,6.6 26.54,30.1 28.07,29.97 26.54,28.83 28.07,28.83 27.3,29.46 30.35,6.35 32.13,5.84 11.05,6.86 10.67,30.1 34.15,16.31 4.01,36.2 5.94,32.92 5.69,31.83 6.86,30.99 29.06,24.16 18.8,9.91 8.38,36.58
  pour Route2: 0,38.1 38.1,38.1 38.1,0 0,0
  pour Route15: 0,0 38.1,0 38.1,38.1 0,38.1
  pour Route6: 0,38.1 38.1,38.1 38.1,0 0,0
  pour Top (rank 2): 0,0 38.1,0 38.1,38.1 0,38.1
  pour Route3: 0,0 38.1,0 38.1,38.1 0,38.1
  pour Route7: 0,0 38.1,0 38.1,38.1 0,38.1
  pour Bottom: 0,0 0,38.1 38.1,38.1 38.1,0
I2C0_SCL/UART_TX  (via drill 0.2)
  Top 0.152: RT:U1.8 33.81,26.19 v33.27,25.65 | MP:U1.P$17 23.95,31.48 24.21,31.75 v24.51,31.75 | v25.4,3.94 24.89,4.45 24.89,6.99 26.04,8.13 26.04,10.03 28.45,12.45 v32.38,12.45 | v13.18,34.75 12.25,35.68 J4.P$5
  Route4 0.152: v24.51,31.75 25.02,31.24 29.21,31.24 29.72,30.73 29.72,29.21 v33.27,25.65 35.18,23.75 v36.45,23.75
  Route7 0.152: v24.51,31.75 19.26,31.75 18.69,31.19 16.06,31.19 14.99,32.26 14.99,32.94 v13.18,34.75
  Bottom 0.152: v36.45,23.75 36.45,21.84 35.18,20.57 35.18,17.27 35.69,16.76 35.69,15.11 35.18,14.61 35.18,13.59 34.04,12.45 v32.38,12.45 | BT:U1.14 25.54,4.07 v25.4,3.94
I2C0_SDA/UART_RX  (via drill 0.2)
  Top 0.152: v28.45,12.95 25.65,10.16 25.65,8.26 24.51,7.11 24.51,4.06 v25.4,3.17 | RT:U1.1 35.94,26.29 v35.94,25.65 | v13.97,34.75 12.65,36.07 J4.P$6 | v24.38,32.51 23.86,31.98 MP:U1.P$18
  Route4 0.152: v24.38,32.51 25.27,32.51 26.16,31.62 30.86,31.62 31.5,30.99 31.5,28.7 33.27,26.92 34.67,26.92 v35.94,25.65
  Route7 0.152: v13.97,34.75 16.2,32.51 v24.38,32.51
  Bottom 0.152: v35.94,25.65 35.94,21.97 34.8,20.83 34.8,17.14 35.31,16.64 35.31,15.37 34.8,14.86 34.8,13.84 33.91,12.95 v28.45,12.95 | BT:U1.13 25.8,3.57 v25.4,3.17
I2C1_SCL  (via drill 0.2)
  Top 0.15: J4.P$1 10.65,37.11 10.41,37.34 9.78,37.34
  Top 0.152: FP:U2.A4 33.41,19.11 v33.88,18.65 | 9.78,37.34 9.4,36.96 9.4,36.32 8.64,35.56 v8.64,32.13
  Route4 0.152: v14.73,19.18 13.72,20.19 v13.72,21.46 v12.19,21.46 | v22.43,21.95 22.89,21.95 v25.65,19.18 | v8.64,32.13 8.64,31.37 9.78,30.23 9.78,29.46 10.54,28.7 10.54,27.92 8.26,25.64 v8.26,23.88 | v37.08,15.24 37.47,15.62 37.47,16.76 35.58,18.65 v33.88,18.65 33.5,19.02 29.69,19.02 29.08,18.41 v29.08,18.03
  Route7 0.152: v36.07,30.73 35.69,30.35 35.69,27.3 37.47,25.53 37.47,15.62 v37.08,15.24
  Bottom 0.152: 21.21,19.18 v14.73,19.18 13.69,18.13 13.69,17.55 13.99,17.25 SA:U3.10 | 21.21,19.18 v25.65,19.18 27.94,19.18 v29.08,18.04 v29.08,18.03 | 21.21,19.18 21.21,17.78 22.73,16.26 SA:U5.2 | v22.43,21.95 SA:U2.P$9 | v12.19,21.46 10.06,23.6 8.53,23.6 v8.26,23.88 5.84,23.88 4.45,25.27 4.45,26.21 DP:U1.6 | J3.4 35.66,31.9 36.07,31.5 v36.07,30.73 | v13.72,21.46 13.79,21.53 SA:U4.4
I2C1_SDA  (via drill 0.2)
  Top 0.152: FP:U2.F4 30.8,19.11 v30.1,18.41 | v9.27,32.77 9.27,35.56 9.53,35.81 10.67,35.81 11.05,36.19 J4.P$2
  Route4 0.152: v26.42,19.68 v26.42,18.54 | v9.78,24.13 9.78,26.67 10.92,27.82 10.92,28.96 10.16,29.72 10.16,30.61 9.27,31.5 v9.27,32.77 | v30.1,18.41 30.1,17.78 30.86,17.02 33.02,17.02 33.78,17.78 35.31,17.78 v36.83,16.26
  Route7 0.152: v34.42,30.86 34.42,27.94 37.08,25.27 37.08,16.51 v36.83,16.26
  Bottom 0.152: 12.95,19.68 12.95,17.65 13.95,16.65 SA:U3.9 | 12.95,19.68 21.97,19.68 | 21.97,19.68 v26.42,19.68 28.83,19.68 v30.1,18.41 | 12.95,21.5 13.79,22.33 SA:U4.3 | 12.95,21.5 12.94,21.48 10.29,24.13 v9.78,24.13 9.65,24.13 8.62,25.16 DP:U3.6 | 12.95,21.5 12.95,19.68 | SA:U2.P$11 22.03,19.75 21.97,19.68 | J3.3 34.66,31.11 v34.42,30.86 | v26.42,18.54 27.3,17.65 27.3,15.75 26.8,15.24 26.16,15.24 25.8,15.61 SA:U5.6
I2C2_SCL  (via drill 0.2)
  Top 0.15: v33.91,20.19 33.91,20.13 33.69,19.91 FP:U2.A2
  Top 0.152: J4.P$3 11.45,36.08 v10.67,35.31
  Route4 0.15: v33.91,20.19 34.69,20.19 37.49,23
  Route4 0.152: v5.08,9.4 5.59,8.89 v5.59,4.32 | v19.68,10.29 20.07,9.91 v20.07,8.64 | v14.1,7.24 v14.1,8.51 | v10.67,35.31 11.18,35.81 15.24,35.81 15.62,36.2 21.21,36.2 22.38,37.36 25.63,37.36 26.92,36.07 31.37,36.07 35.43,32 35.43,27.57 37.49,25.52 37.49,23
  Route7 0.152: v29.59,14.05 27.86,14.05 v27.18,14.73
  Bottom 0.152: 4.32,9.4 v5.08,9.4 11.29,9.4 | 4.32,9.4 3.81,9.4 1.65,7.24 1.65,5.88 1.89,5.63 SB:U5.2 | 31.75,19.05 27.43,14.73 v27.18,14.73 24,14.73 22.73,13.46 20.7,13.46 19.68,12.45 v19.68,10.29 19.68,9.91 18.29,8.51 v14.1,8.51 12.18,8.51 11.29,9.4 | 31.75,19.05 32.89,20.19 v33.91,20.19 | v20.07,8.64 20.19,8.64 21.3,7.53 SB:U6.P$7 | v14.1,7.24 13.97,7.11 13.97,6.19 13.63,5.85 SB:U7.A1 | DP:U2.6 28.31,21.48 29.72,20.07 30.73,20.07 31.75,19.05 | J2.4 29.84,13.8 v29.59,14.05 | v10.67,35.31 10.67,34.04 10.24,33.6 7.95,33.6 6.73,32.38 5.46,32.38 5.07,32.77 SB:U4.P$4 | SB:U1.4 12.07,10.18 11.29,9.4 | SB:U3.6 4.32,10.48 4.32,9.4 | SB:U2.2 6.87,5.6 v5.59,4.32
I2C2_SDA  (via drill 0.2)
  Top 0.152: FP:U2.A1 33.27,20.31 v33.91,20.95 | J4.P$4 11.85,35.72 v11.38,35.26
  Route4 0.152: v10.03,10.54 9.65,10.16 v9.65,8.89 | v1.52,8.38 v4.95,8.38 | v33.91,20.95 33.91,21.34 v33.27,21.97 35.94,21.97 37.08,23.11 37.08,25.4 35.05,27.43 35.05,31.75 31.11,35.69 26.67,35.69 25.4,36.96 22.61,36.96 21.46,35.81 15.88,35.81 15.49,35.43 11.56,35.43 v11.38,35.26
  Bottom 0.152: v33.91,20.95 34.42,20.45 34.42,18.07 33.84,17.49 32.09,17.49 29.91,15.3 | 6.35,8.89 v9.65,8.89 11.18,8.89 12.06,8 13.4,8 | 6.35,8.89 5.46,8.89 v4.95,8.38 3.15,6.58 SB:U5.4 | 13.4,8 18.41,8 19.94,9.53 | 19.94,9.53 20.27,9.86 20.27,12.53 20.83,13.08 22.86,13.08 24,14.22 28.83,14.22 29.91,15.3 | 19.94,9.53 21.8,7.67 SB:U6.P$8 | DP:U4.6 32.75,22.49 v33.27,21.97 | J2.3 30.41,14.8 29.91,15.3 | 6.35,8.89 6.35,6.48 6.73,6.1 SB:U2.3 | 13.4,8 13.37,7.97 SB:U7.A2 | SB:U4.P$6 3.8,31.75 4.3,31.24 6.1,31.24 8.13,33.27 10.41,33.27 11.38,34.24 v11.38,35.26 | v10.03,10.54 11.18,11.69 SB:U1.6 | SB:U3.1 1.34,8.56 v1.52,8.38
ISL23415_SPI_CS  (via drill 0.2)
  Top 0.152: v9.91,28.45 10.54,28.45 12.68,30.58 12.68,30.96 v12.7,30.99 12.65,31.04 J4.P$16 | MP:U1.P$20 21.96,33.31 v22.43,33.78
  Route4 0.152: v9.91,28.45 9.86,28.4 v5.97,28.4 | v17.27,34.04 16.21,34.04 14.56,32.39 14.1,32.39 v12.7,30.99
  Route7 0.152: v17.27,34.04 17.53,34.29 20.32,34.29 21.46,33.15 21.79,33.15 v22.43,33.78 23.19,33.02 24.13,33.02 25.15,34.04 26.29,34.04 29.72,30.61 29.72,25.76 | v28.83,24.87 29.72,25.76 | v32.77,24.89 29.97,24.89 29.72,24.64 29.72,25.76
  Bottom 0.152: v5.97,28.4 4.65,28.4 4.43,28.18 DP:U1.4 | v9.91,28.45 9.45,28.45 DP:U3.4 | v28.83,24.87 28.6,24.87 28.31,24.58 DP:U2.4 | v32.77,24.89 32.77,24.08 DP:U4.4
MP:AT45DB321F_SPI_CS  (via drill 0.2)
  Top 0.152: MP:U2.4 29.81,26.76 30.23,27.18 v30.23,30.35 | MP:U1.P$16 v24.26,30.99
  Bottom 0.152: v30.23,30.35 29.08,31.5 25.4,31.5 24.89,30.99 v24.26,30.99
MP:EXTAL0
  Top 0.152: MP:U1.P$5 17.45,29.98 17.2,30.24 14.97,30.24 13.18,28.45 MP:Y1.P$1 13.32,28.01 MP:C3.1
MP:N$4
  Top 0.152: MP:R1.1 29.59,32.55 MP:U2.5
MP:XTAL0
  Top 0.152: MP:C4.1 17.09,27 MP:Y1.P$2 18.32,28.45 19.16,29.28 MP:U1.P$6
PV:LBOOST
  Top 0.305: 16.31,8.33 PV:U1.20
  Top 0.406: 16.31,8.33 14.86,9.78 14.86,12.3 PV:L1.2
PV:LBUCK
  Top 0.254: PV:L2.2 20.49,10.04 PV:U1.16
PV:OK_HYST
  Top 0.152: PV:R4.2 20.08,1.38 19.05,2.41 18.81,2.41 PV:R3.1 18.78,2.92 PV:U1.10
PV:OK_PROG
  Top 0.152: PV:R5.2 20.72,2.41 PV:R4.1 19.5,3.62 PV:U1.11
PV:VBAT_OV
  Top 0.127: PV:R1.1 PV:R2.2
  Top 0.152: PV:R1.1 16.38,3.56 17.28,4.45 PV:U1.7
PV:VOUT_SET
  Top 0.152: PV:R6.1 21.04,5.9 PV:R7.2 PV:U1.12
PV:VRDIV  (via drill 0.2)
  Top 0.152: PV:R6.2 20.47,4.19 v20.21,3.94 | 17.55,1.38 v17.55,3.17 v17.55,3.18 17.55,4.07 17.78,4.3 PV:U1.8 | PV:R1.2 17.55,1.38 | 17.55,1.38 PV:R3.2
  Route7 0.15: v17.55,3.18 18.56,3.18 19.32,3.94 v20.21,3.94
PV:VREF_SAMP
  Top 0.152: PV:C12.1 13.42,4.66 14.87,6.1 PV:U1.4
PV:VSTOR  (via drill 0.2)
  Top 0.152: 16.98,11.18 PV:C11.1 | PV:U1.6 16.73,4.83 v15.24,4.83
  Top 0.254: PV:C10.1 17.3,11.5 16.98,11.18 | v14.52,6.56 14.56,6.6 PV:U1.3 | PV:U1.19 17.28,9.26 v17.02,9.53 16.95,9.59 PV:C11.1
  Route7 0.15: v15.24,4.83 14.99,4.83 14.48,5.33 14.48,6.52 v14.52,6.56 17.02,9.06 v17.02,9.53
PV_VIN  (via drill 0.45, 0.65)
  Top 0.152: J4.P$15 12.25,31.3 v11.68,30.73 | 14.45,7.9 14.47,7.88
  Top 0.254: 14.47,7.88 15.25,7.1 PV:U1.2 | PV:C9.1 14.45,7.9
  Top 0.406: v11.51,1.02 10.98,1.02 10.4,1.6 10.4,7.2 11.1,7.9 PV:C9.1 11.41,8.89 PV:L1.1 11.41,16.02 v11.18,16.26
  Route4 0.406: v11.18,16.26 10.54,16.89 10.54,26.15 11.68,27.29 v11.68,30.73
PV_VOUT  (via drill 0.4, 0.65)
  Top 0.152: PV:C13.1 22.69,9.15
  Top 0.254: PV:C13.1 22.95,7.96 22.09,7.1 PV:U1.14 | 22.69,9.15 PV:L2.1
  Top 0.406: v14.38,25.04 13.34,24 S2.1 | PV:L2.1 23.45,13.21 v24.26,13.21 | PV:TP1.TP PV:C13.1
  Route4 0.406: v24.26,13.21 24.26,14.35 22.73,15.88 20.7,15.88 14.38,22.2 v14.38,25.04
REG_CTRL  (via drill 0.2)
  Top 0.152: RG:R5.2 22.95,15.11 v18.8,15.11 | RG:U1.4 16.23,18.43 v16.15,18.51 | MP:U1.P$19 23,32.78 v23.88,33.66
  Route4 0.152: v16.15,18.51 16.15,17.76 v18.8,15.11
  Route7 0.152: v23.88,33.66 23.24,34.29 21.08,34.29 19.56,35.81 13.21,35.81 11.18,33.78 8.89,33.78 8,32.89 8,28.83 10.67,26.16 10.67,21.08 11.68,20.07 14.99,20.07 16.15,18.9 v16.15,18.51
REG_LOAD
  pour Top: 17.02,17.53 17.02,16.76 17.65,16.76 17.65,17.53
REG_VIN
  Top 0.152: RG:U1.1 RG:U1.12 19.31,21.36 RG:C1.1 18.66,22.73 S2.2' S2.1'
  Top 0.406: FP:U1.2 23.4,24.65 FP:C1.1 18.68,24.65 S2.1'
  pour Top (isolate 0.254): 17.27,19.94 17.27,24.89 19.43,24.89 19.43,19.94
REG_VSEL1  (via drill 0.2)
  Top 0.152: RG:U1.11 19.84,19.43 20.59,20.18 | RG:R1.2 23.43,20.86 21.27,20.86 20.59,20.18 | v20.57,20.19 20.59,20.18 | MP:U1.P$1 18.5,32.64 v18.5,33.36
  Route4 0.152: v18.5,33.36 17.91,32.77 16.26,32.77 15.88,32.38 15.88,30.99 15.08,30.19 15.08,26.83 16.76,25.15 16.76,23.11 19.68,20.19 v20.57,20.19
REG_VSEL2  (via drill 0.2)
  Top 0.152: RG:U1.10 20.48,18.93 20.89,19.34 21.46,19.34 | MP:U1.P$2 18.57,31.48 v18.23,31.82 | v21.46,20.19 21.46,19.34 | 21.46,19.34 RG:R2.2
  Route4 0.152: v21.46,20.19 17.65,24 17.65,31.24 v18.23,31.82
REG_VSEL3  (via drill 0.2)
  Top 0.152: MP:U1.P$9 20.96,26.79 v21.21,26.54 | RG:U1.9 20.71,18.43 20.95,18.67 v21.72,18.67 | RG:R3.2 25.08,18.48 v25.02,18.54
  Route4 0.152: v21.72,18.67 22.1,19.05 24.51,19.05 v25.02,18.54
  Route7 0.152: v21.72,18.67 22.1,19.05 22.1,21.08 21.21,21.97 v21.21,26.54
REG_VSEL4  (via drill 0.2)
  Top 0.152: RG:U1.8 20.17,17.93 v20.19,17.91 21.43,17.91 RG:R4.2 | v27.05,20.45 26.55,20.95 26.55,21.71 24.38,23.88 24.38,25.27 23.3,26.35 22.16,26.35 21.46,27.05 MP:U1.P$10
  Route4 0.152: v27.05,20.45 27.05,18.29 26.67,17.91 v20.2,17.91 v20.19,17.91
RG:LOAD
  Top 0.127: RG:U2.A1 17.43,17.42 RG:U1.6
RG:SW
  Top 0.254: RG:U1.2 15.5,19.43 14.9,20.02
  Top 0.305: RG:L1.1 14.9,20.02
RT:N$3
  Top 0.152: RT:U1.7 33.76,28.07 RT:R1.1
RTC_!INT!/RESET_B  (via drill 0.2)
  Top 0.15: MP:R3.1 v20.94,36.96 20.95,36.94
  Top 0.152: v16.64,36.83 15.62,35.81 14.52,35.81 14.25,36.09 J4.P$10 | RT:U1.6 33.17,29.02 32.86,29.34 v32.38,29.34 31.37,29.34 31.23,29.47 RT:R2.1 | S3.A 25.01,33.88 23.88,35.01 v23.88,35.94 23.88,36.96 | 23.88,36.96 v20.95,36.96 20.95,36.94 20.46,36.45 MP:U1.P$23 | 23.88,36.96 24.83,36.96 S3.A' 25.74,37.52 31.42,37.52 J5.10
  Route4 0.152: v16.64,36.83 16.89,36.58 20.57,36.58 v20.95,36.96
  Route7 0.152: v23.88,35.94 28.7,35.94 31.75,32.89 31.75,29.97 v32.38,29.34
SA:N$2
  Bottom 0.152: SA:U3.4 SA:U3.5
SB:CAP
  Bottom 0.152: SB:C6.1 10,4.52 SB:U2.14
SB:N$1
  Bottom 0.152: SB:U1.2 13.07,9.52 SB:C3.1
SB:N$2
  Bottom 0.152: SB:U4.P$2 5.58,33.77 6.35,34.54 SB:C11.1
SB:N$3
  Bottom 0.152: SB:U4.P$8 2.8,31.65 1.91,30.75 SB:C12.1
SB:SI4705_FMI  (via drill 0.65)
  Bottom 0.152: v22.23,1.02 19.68,3.56 19.68,4.83 19.95,5.09 SB:U6.P$2
SI4705_!RST  (via drill 0.2)
  Top 0.152: MP:U1.P$14 23.86,29.98 v24.38,29.46
  Route4 0.152: v16,3.94 16,8.2 v10.11,14.1
  Route7 0.152: v24.38,29.46 17.14,29.46 14.99,31.62 11.54,31.62 10.65,30.73 10.41,30.73 9.91,30.23 9.91,29.72 11.43,28.19 v11.43,21.21
  Bottom 0.152: SB:U6.P$5 20.18,6.59 18.8,5.21 17.78,5.21 16.51,3.94 v16,3.94 | v11.43,21.21 10.67,20.45 10.67,17.14 10.11,16.58 v10.11,14.1
SPI_MISO/UART_RTS  (via drill 0.2)
  Top 0.152: FP:U2.F1 30.61,20.31 v30.1,20.83 | J4.P$12 11.05,32.89 v9.91,31.75 | v31.37,26.04 v28.7,26.04 | MP:U1.P$8 20.46,27.42 v20.27,27.23 | MP:U2.8 25.4,32.51 v25.91,33.02
  Route4 0.152: v25.53,5.46 24.89,6.1 24.89,11.05 28.57,14.73 28.57,19.43 29.97,20.83 v30.1,20.83 30.73,21.46 30.73,24.38 29.08,26.04 v28.7,26.04 28.07,26.67 27.36,26.67 26.8,26.11 v26.8,25.91 | v5.97,29.84 6.1,29.97 v9.14,29.97
  Route7 0.152: v30.1,20.83 29.46,20.83 23.11,27.18 | 23.11,27.18 22.61,27.69 20.73,27.69 v20.27,27.23 | v25.91,33.02 25.91,32.26 25.14,31.49 25.14,28.24 24.59,27.69 23.62,27.69 23.11,27.18
  Bottom 0.152: DP:U1.2 3.43,28.32 4.95,29.84 v5.97,29.84 | DP:U2.2 27.31,25.4 v26.8,25.91 | DP:U3.2 7.62,28.45 v9.14,29.97 9.14,30.99 v9.91,31.75 10.19,32.03 15.34,32.03 18.67,28.7 20.07,28.7 20.27,28.5 v20.27,27.23 20.07,27.43 SA:U1.P$7 | DP:U4.2 31.75,24.89 31.37,25.27 v31.37,26.04 | BT:U1.16 25.91,5.07 v25.53,5.46
SPI_MOSI/UART_CTS  (via drill 0.2)
  Top 0.152: FP:U2.E1 31.33,20.49 v30.1,21.72 | J4.P$13 11.45,32.27 v10.67,31.5 | v32.26,25.53 32.13,25.4 28.19,25.4 v28.14,25.35 | MP:U1.P$11 21.96,27.82 22.1,27.69 23.37,27.69 v23.88,27.18 24.29,26.76 MP:U2.1
  Route4 0.152: v25.4,4.7 24.38,5.71 24.38,11.18 28.07,14.86 28.07,19.68 v30.1,21.72 30.1,24.38 29.08,25.4 28.19,25.4 | v9.27,29.08 9.22,29.13 v5.97,29.13 | 28.19,25.4 28.09,25.4 v28.14,25.35 28.19,25.4 | v18.8,28.19 19.3,27.69 19.3,26.16 20.07,25.4 21.08,25.4 22.86,27.18 v23.88,27.18
  Route7 0.152: v30.1,21.72 24.64,27.18 v23.88,27.18
  Bottom 0.152: DP:U3.3 8.12,27.94 v9.27,29.08 10.03,29.84 10.03,30.86 v10.67,31.5 10.79,31.62 15.24,31.62 18.17,28.69 18.17,28.19 | DP:U1.3 3.93,28.19 4.88,29.13 v5.97,29.13 | DP:U2.3 27.81,25.02 v28.14,25.35 | DP:U4.3 v32.25,25.52 v32.26,25.53 | BT:U1.15 25.53,4.57 v25.4,4.7 | SA:U1.P$6 18.17,27.93 18.17,28.19 | 18.17,28.19 v18.8,28.19
SPI_SCK  (via drill 0.2)
  Top 0.152: FP:U2.D1 31.73,20.85 v31.24,21.34 | MP:U2.2 26,27.43 24.67,27.43 23.91,28.19 v23.88,28.19 23.24,28.83 22.73,28.83 22.59,28.68 MP:U1.P$12 | J4.P$11 10.65,33.25 v10.16,32.77
  Route4 0.152: v31.24,21.34 31.24,24.51 28.57,27.18 24.89,27.18 v23.88,28.19 | v16.41,32 16.41,30.38 v15.75,29.72
  Bottom 0.152: DP:U3.1 7.12,30.47 | DP:U1.1 2.93,28.59 4.83,30.48 7.11,30.48 7.12,30.47 | DP:U2.1 26.81,25.01 25.21,26.61 | 25.21,26.61 23.88,27.94 v23.88,28.19 23.37,27.69 22.86,27.69 21.46,29.08 18.8,29.08 16.41,31.47 v16.41,32 16.03,32.38 10.54,32.38 v10.16,32.77 7.87,30.48 7.14,30.48 7.12,30.47 | DP:U4.1 31.25,24.63 29.27,26.61 25.21,26.61 | v15.75,29.72 16.13,29.72 16.63,29.22 SA:U1.P$4
SWD_CLK  (via drill 0.2)
  Top 0.152: MP:U1.P$22 20.96,34.29 21.7,35.04 MP:R4.1 21.99,35.05 v22.99,35.05 | v17.14,35.18 14.76,35.18 13.85,36.09 J4.P$9 | v30.23,33.15 31.98,33.15 J5.4
  Route4 0.152: v17.14,35.18 22.86,35.18 v22.99,35.05 26.04,35.05 v27.94,33.15 v30.23,33.15
SWD_DIO  (via drill 0.2)
  Top 0.152: MP:U1.P$24 19.79,32.78 v19.3,33.27 19.83,33.8 MP:R2.1 | J4.P$8 13.45,36.08 14.86,34.67 v15.88,34.67 | J5.2 30.86,31.75 v30.35,32.26
  Route4 0.152: v15.88,34.67 18.41,34.67 19.3,33.78 v19.3,33.27 20.45,34.42 25.65,34.42 27.81,32.26 v30.35,32.26
USB:VBUS  (via drill 0.4)
  Top 0.152: 6.83,33.56 v6.86,33.53
  Top 0.406: USB:FB1.2 7.53,33.03 7.04,33.53 v6.86,33.53 | USB:P1.1 6.83,33.56
USB_5V
  Top 0.152: 6.25,24.39 CH:C1.1 7.53,26.14 USB:FB1.1 8.51,27.33 8.51,27.56 | J4.P$14 11.85,31.94 10.77,30.86 9.27,30.86 8.51,30.1 8.51,27.56 | 8.51,27.56 8.53,27.54 USB:C2.1
  Top 0.254: CH:U1.13 6.25,24.39
  pour Top (isolate 0.254): 5.71,24.13 6.48,24.13 7.62,25.27 9.65,25.27 9.65,27.81 7.11,27.81 7.11,26.67 5.71,25.27
VCC_QIIC  (via drill 0.4, 0.45)
  Top 0.127: RG:U3.A1 21.21,16.18
  Top 0.406: v26.42,16.18 21.21,16.18
  Route7 0.406: v26.42,16.18 27.18,15.42 v34.44,15.42 35.05,16.03 35.05,26.16 33.38,27.84 33.38,29.82 v32.61,30.58
  Bottom 0.152: J2.2 34.06,15.8 v34.44,15.42
  Bottom 0.406: J3.2 33.66,31.63 v32.61,30.58
VS1  (via drill 0.2, 0.65)
  Top 0.127: 12.61,17.66 RG:L1.2 | RG:C2.1 15.51,17.93
  Top 0.152: MP:U1.P$3 18.47,30.98 18.22,31.24 17.43,31.24 MP:C1.1 MP:C2.1 14.46,31.12 v14.45,31.11 13.45,32.12 J4.P$18 | MP:R2.2 MP:R3.2 18.27,37.21 v17.27,37.21 | RT:R1.2 31.14,26.77 v31.11,26.8 RT:R2.2 | MP:R1.2 29.59,35.93 MP:C5.1 28.32,34.04 v28.7,33.66 28.7,32.93 MP:U2.6 | MP:U2.3 27.94,26.34 v27.6,26 | RT:U1.3 36.33,29.02 RT:C1.1 36.96,29.65 v36.96,30.86 36.96,30.96 J5.1
  Top 0.254: 15.51,17.93 RG:U1.5
  Top 0.406: RG:C2.1 12.61,17.66 | v33.66,11.68 34.42,12.45 S1.1
  other vias: 12.7,16.51
  pour Route5: 0,38.1 38.1,38.1 38.1,0 0,0
  pour Route4: 0,0 38.1,0 38.1,38.1 0,38.1
  pour Top (isolate 0.254): 12.06,15.88 12.06,18.16 14.61,18.16 14.73,18.03 15.75,18.03 15.75,17.27 14.73,17.27 13.34,15.88
VS2  (via drill 0.2, 0.6)
  Top 0.127: RG:U3.A2 19.92,16.18 v18.87,16.18 RG:U2.A2
  Top 0.152: J4.P$19 13.84,33.15 v14.1,32.89
  Top 0.406: v36.2,14.48 36.45,14.22 S1.2
  Bottom 0.152: SB:C7.1 5.95,12.06 | 5.95,12.06 SB:C8.1 | SA:C1.1 SA:C2.1 | 7.62,26.92 DP:U3.10 6.91,26.94 DP:C1.1 5.7,26.92 DP:U1.5 3.43,26.92 | 7.62,26.92 DP:U3.5 10.02,26.92 DP:C3.1 10.78,26.94 11.56,26.16 v12.06,26.16 12.32,26.16 13.1,26.94 SA:C2.1 | 31.75,23.37 DP:U4.10 29.99,23.37 DP:C2.1 29.96,23.37 DP:U2.5 27.3,23.37 | 31.75,23.37 DP:U4.5 34.15,23.37 DP:C4.1 | DP:U3.8 7.62,26.92 | DP:U4.8 31.75,23.37 | 27.3,23.37 DP:U2.10 26.23,23.37 25.1,24.5 SA:C3.1 | 27.3,23.37 DP:U2.8 v27.31,21.34 v27.3,21.34 | DP:U1.10 3.43,26.92 | SB:U7.C1 SB:U7.B1 | SB:U7.C1 SB:U7.D1 v11.18,5.85 v11.18,5.84 | v14.99,4.06 14.84,4.21 SB:C18.1 SB:C17.1 12.37,4.53 SB:U7.C1 | SB:C16.1 SB:C15.1 22.23,8.51 22.8,7.94 SB:U6.P$10 22.9,7.09 SB:U6.P$11 23.8,7.57 v23.8,8.15 | 15.48,12.7 SB:C1.1 15.49,13.33 v16.38,14.22 15.49,14.22 14.87,14.85 SA:U3.6 SA:C5.1 | 15.48,12.7 SB:C2.1 13.71,11.05 SB:U1.1 | SA:C3.1 24,23.23 SA:U2.P$3 24.03,21.49 23.88,21.34 23.11,21.34 23.03,21.25 SA:U2.P$13 | SA:C7.1 17.53,24.13 17.33,23.93 SA:U4.8 | SA:C7.1 SA:C6.1 16.84,22.35 SA:U4.6 | DP:U1.8 3.43,26.92 | SA:C7.1 18.91,24.89 20.07,24.89 20.46,24.5 SA:C4.1 | SA:C1.1 13.1,30.29 v13.16,30.35 | 5.95,12.06 v5.33,12.06 4.83,11.56 SB:U3.5 | SA:U2.P$7 22.03,24.43 SA:C4.1 | SA:C3.1 SA:C4.1 | 29.35,8.74 BT:C1.1 28.34,8.75 v28.32,8.76 BT:U1.22 | SA:C8.1 SA:C9.1 | SA:C8.1 21.84,15.62 20.83,16.64 19.33,16.64 v18.87,16.18 18.4,16.65 SA:U3.2 | BT:C2.1 29.36,8.75 29.35,8.74 | SB:U4.P$14 2.8,35.95 SB:C19.1 3.7,37.08 v4.12,37.08 4.14,37.06 5.47,37.06 | SB:U4.P$1 5.47,35.17 SB:C9.1 5.47,37.06 | 5.47,37.06 SB:C10.1 | 29.35,8.74 29.32,8.71 BT:U1.24 | SA:C1.1 13.71,28.72 SA:U1.P$1
  Bottom 0.152: SA:U1.P$14 13.72,26.93 SA:C2.1 | SA:C8.1 23.62,15.62 SA:U5.1 | SB:U1.14 15.48,12.7 | SB:U5.6 3.6,5.63 3.05,5.08 2.28,5.08 SB:U5.1 2.55,4.71 SB:U5.10 1.78,3.64 SB:C13.1 3.68,2.81 SB:C14.1 4.94,2.94 v4.95,2.92 6.49,2.92 SB:C5.1 SB:C4.1 8.64,2.94 SB:U2.16 8.14,4.87 SB:U2.1 7.92,4.49 v7.49,4.06 | SA:U4.2 14.97,23.13 v15.37,22.73 16.42,22.73 SA:U4.6 | SA:U4.6 SA:U4.5 | v7.75,8 7.92,7.83 SB:U2.5
  pour Route14: 0,0 38.1,0 38.1,38.1 0,38.1

## Text on the board
tPlace: GND | USB | BAT | VS1 | PV_VIN | PV_VOUT | Warp Rev. C | VS1 | PV+ | GND | S/N
bPlace: FM ANT